# Altium PCB OBC ARM.PcbDoc
Units mil, origin at the board's own origin, x right, y up, seen from the top; angles counter-clockwise.
Board outline 3757.87 x 3555.12 mil, 4 copper layers (Top Layer, Ground, Power, Bottom Layer), stack 64.6 mil thick; 63 components, 74 nets, 326 pads, 150 vias.
Unrouted connection lines stored in the file: 62.
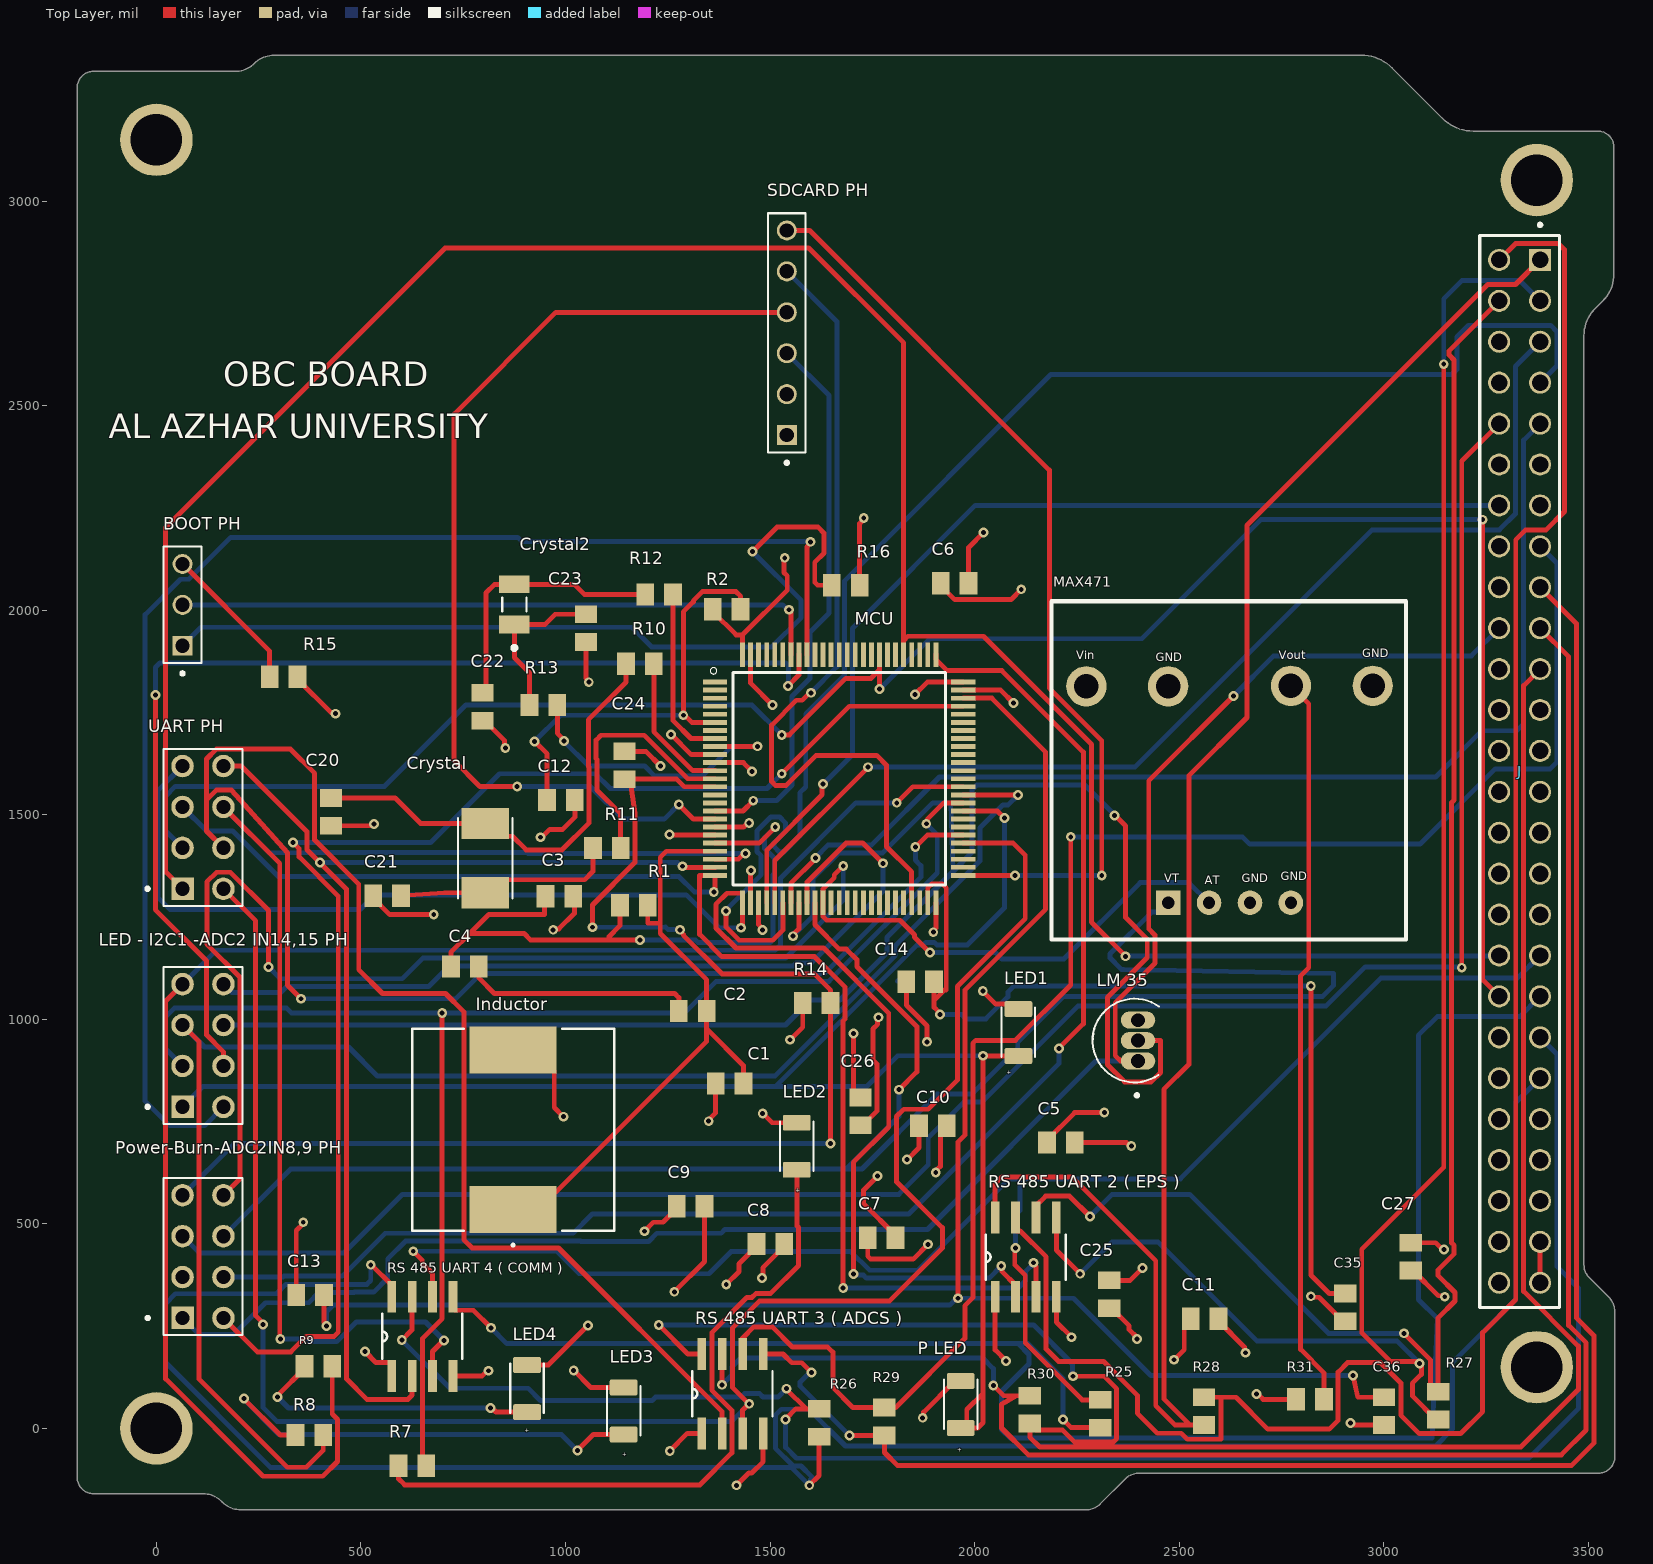
[diagram p0: Top Layer view]
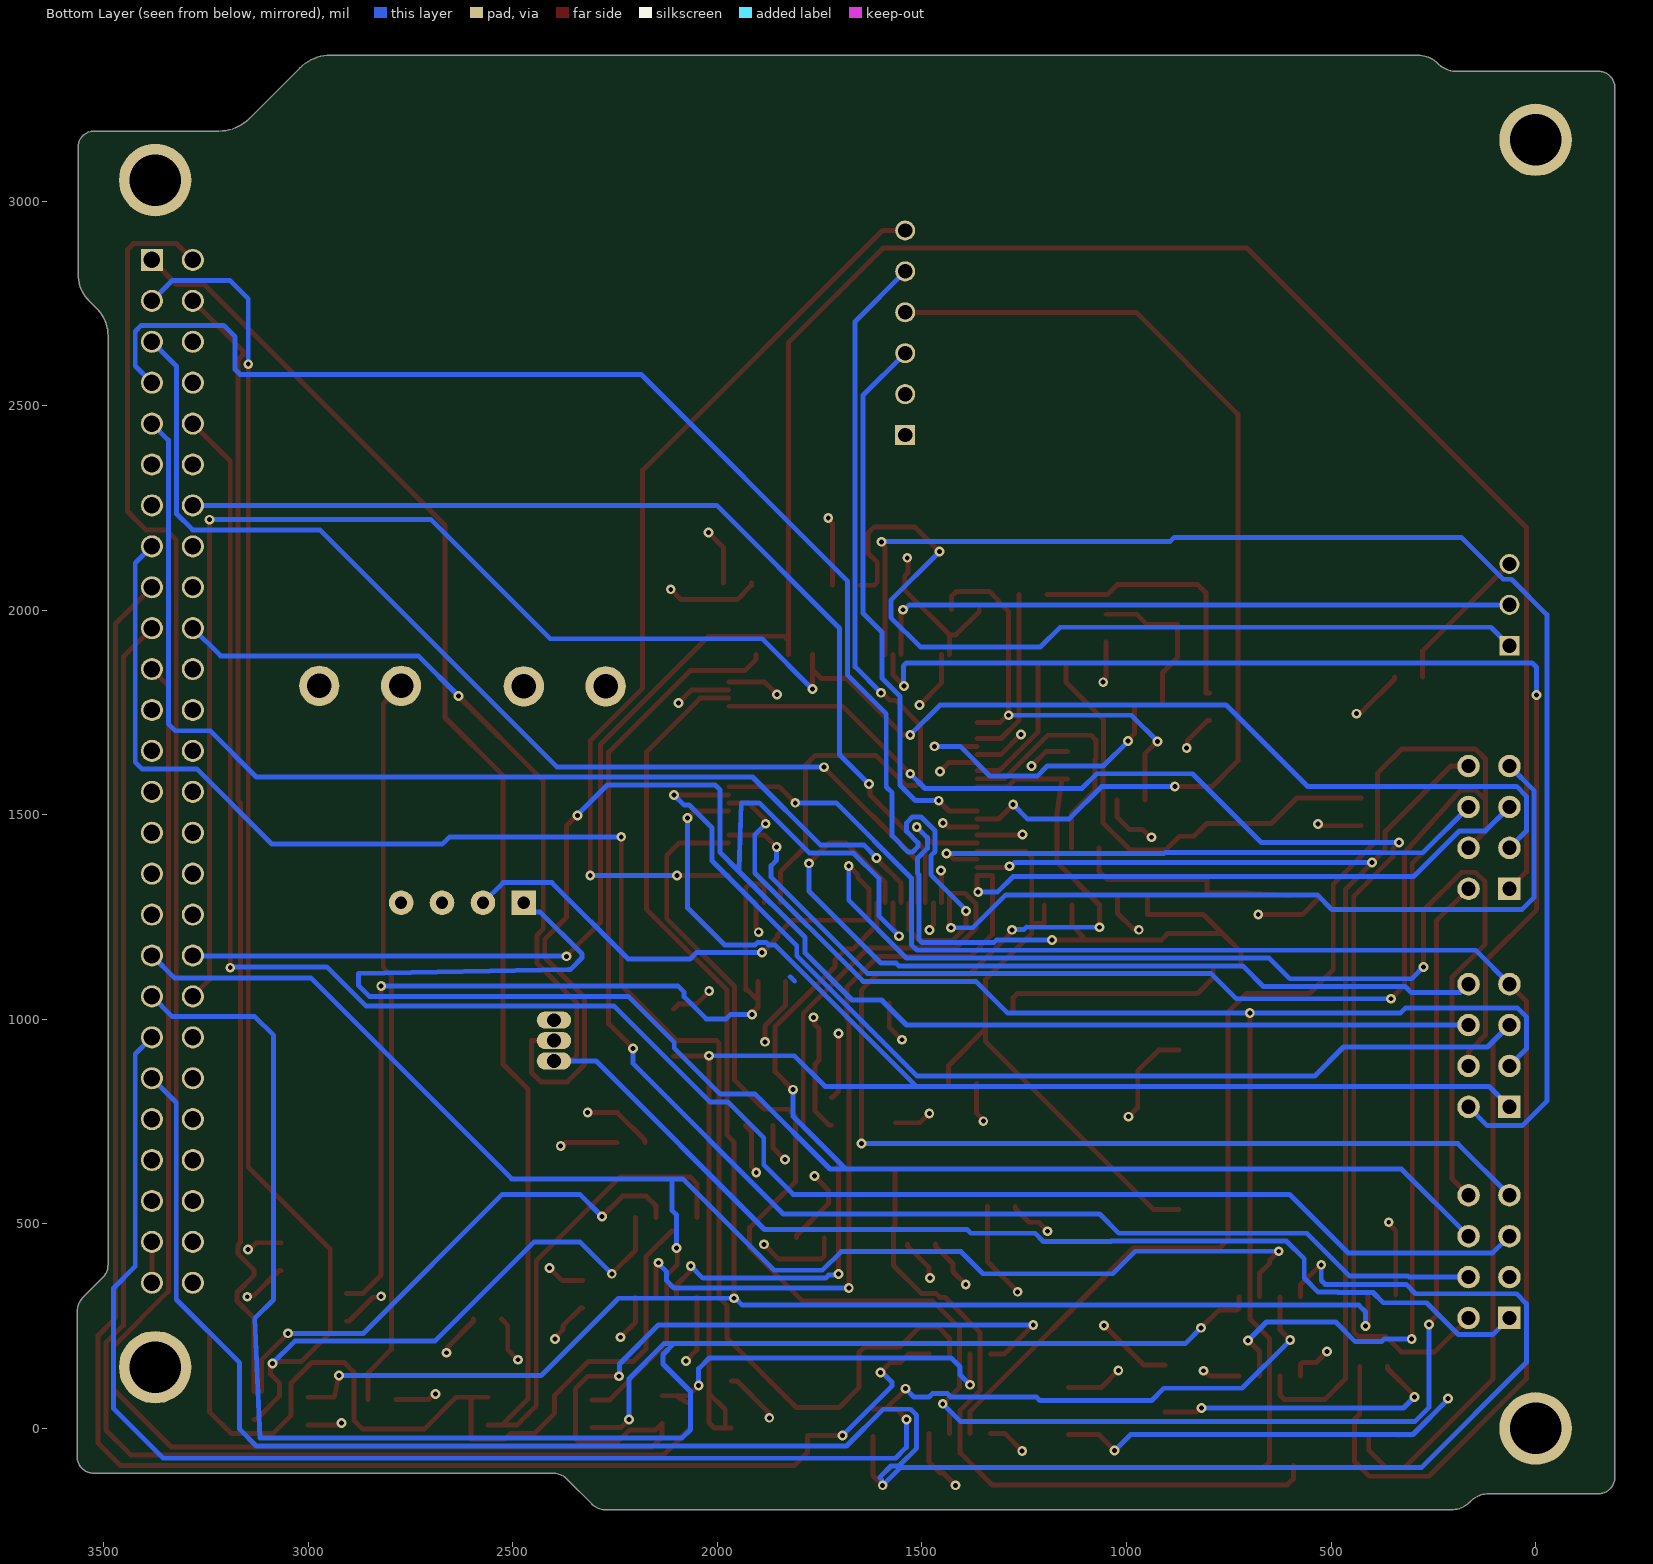
[diagram p1: Bottom Layer view, seen from below]
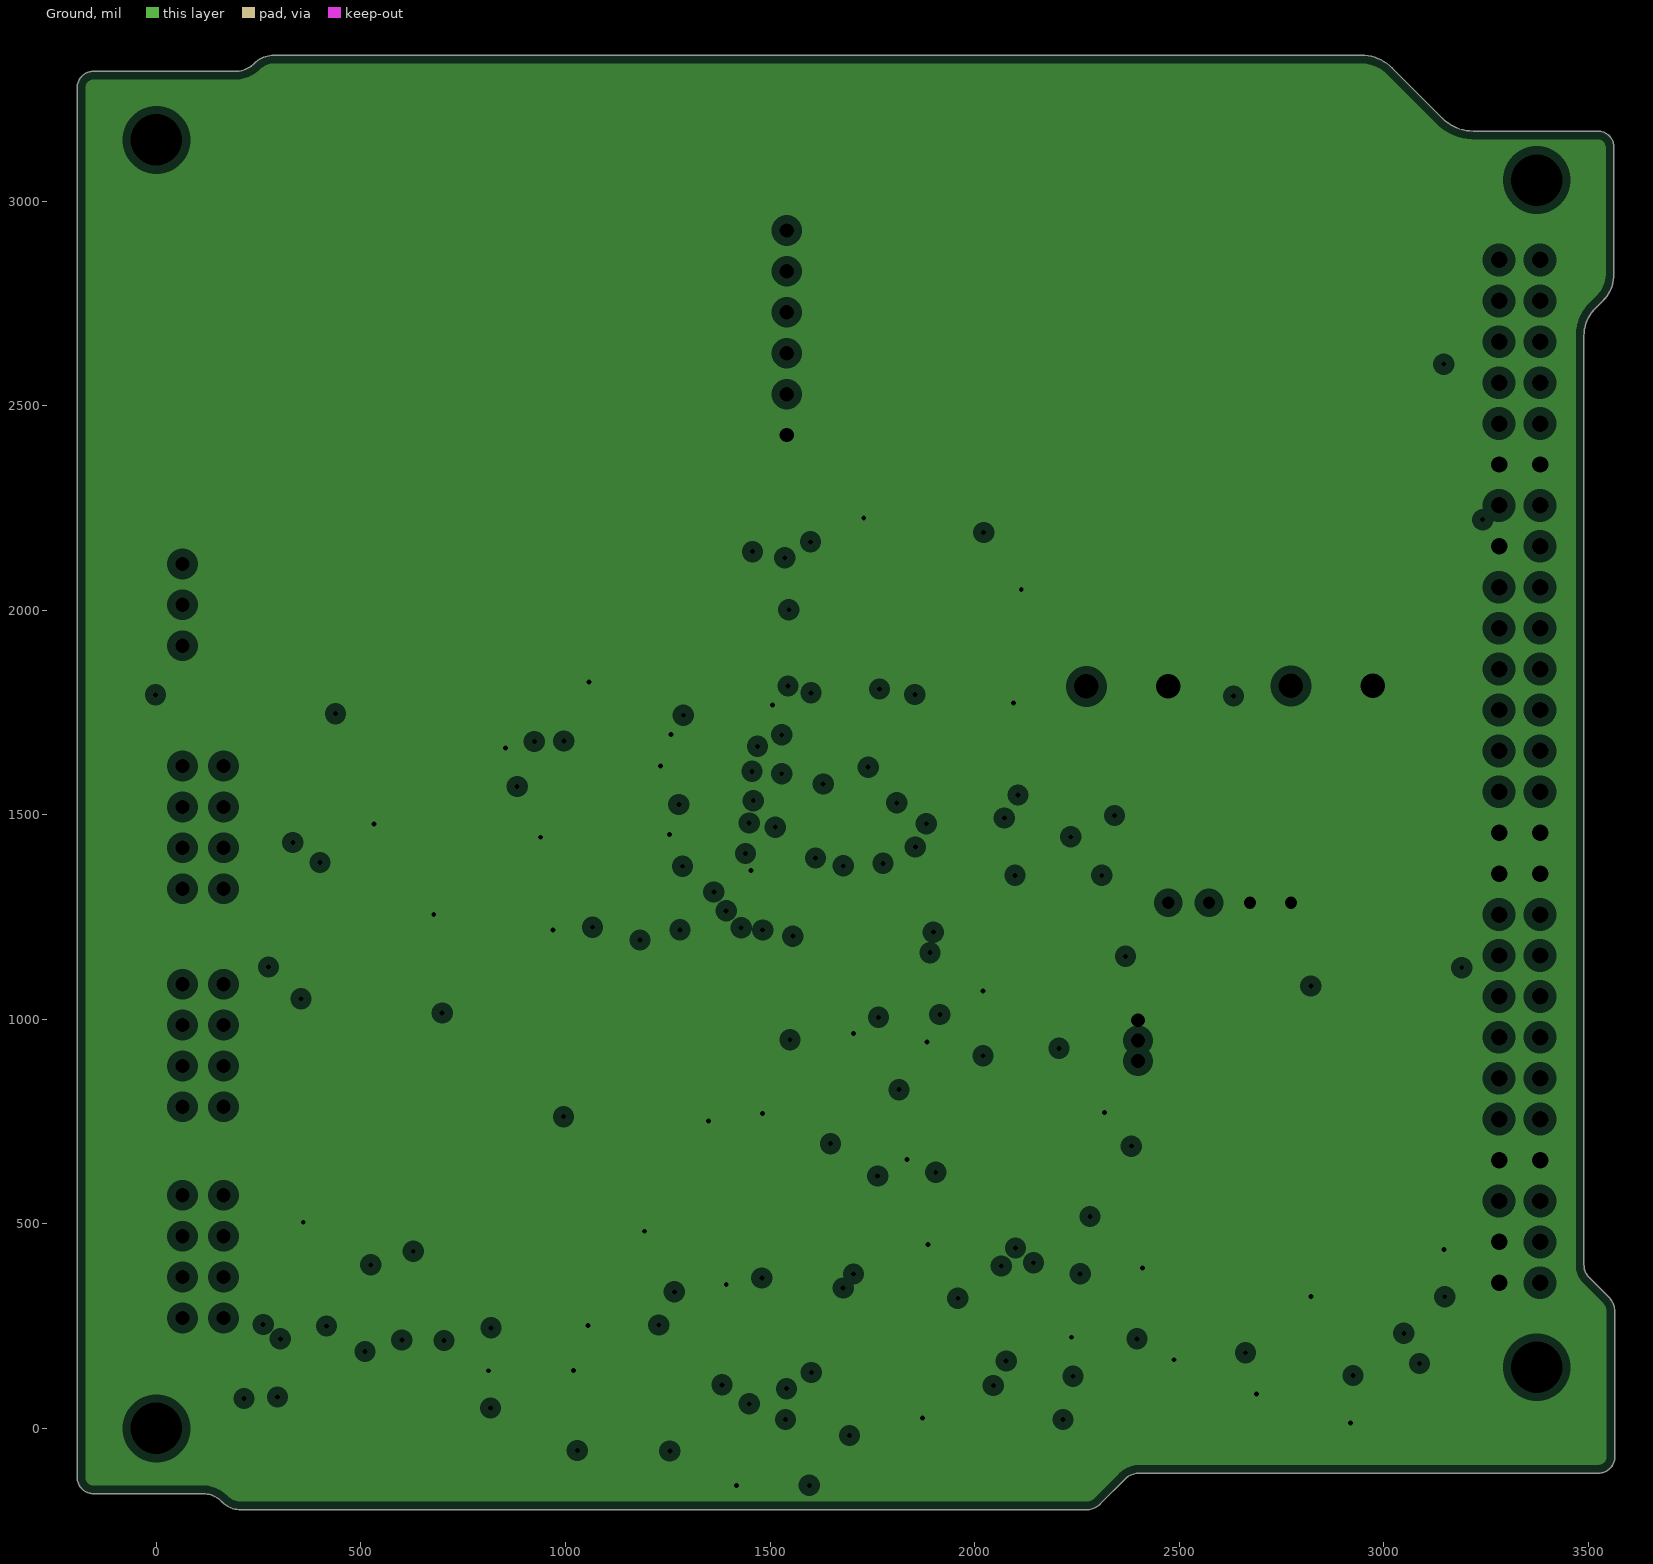
[diagram p2: Ground, clearances drawn from the general rule]
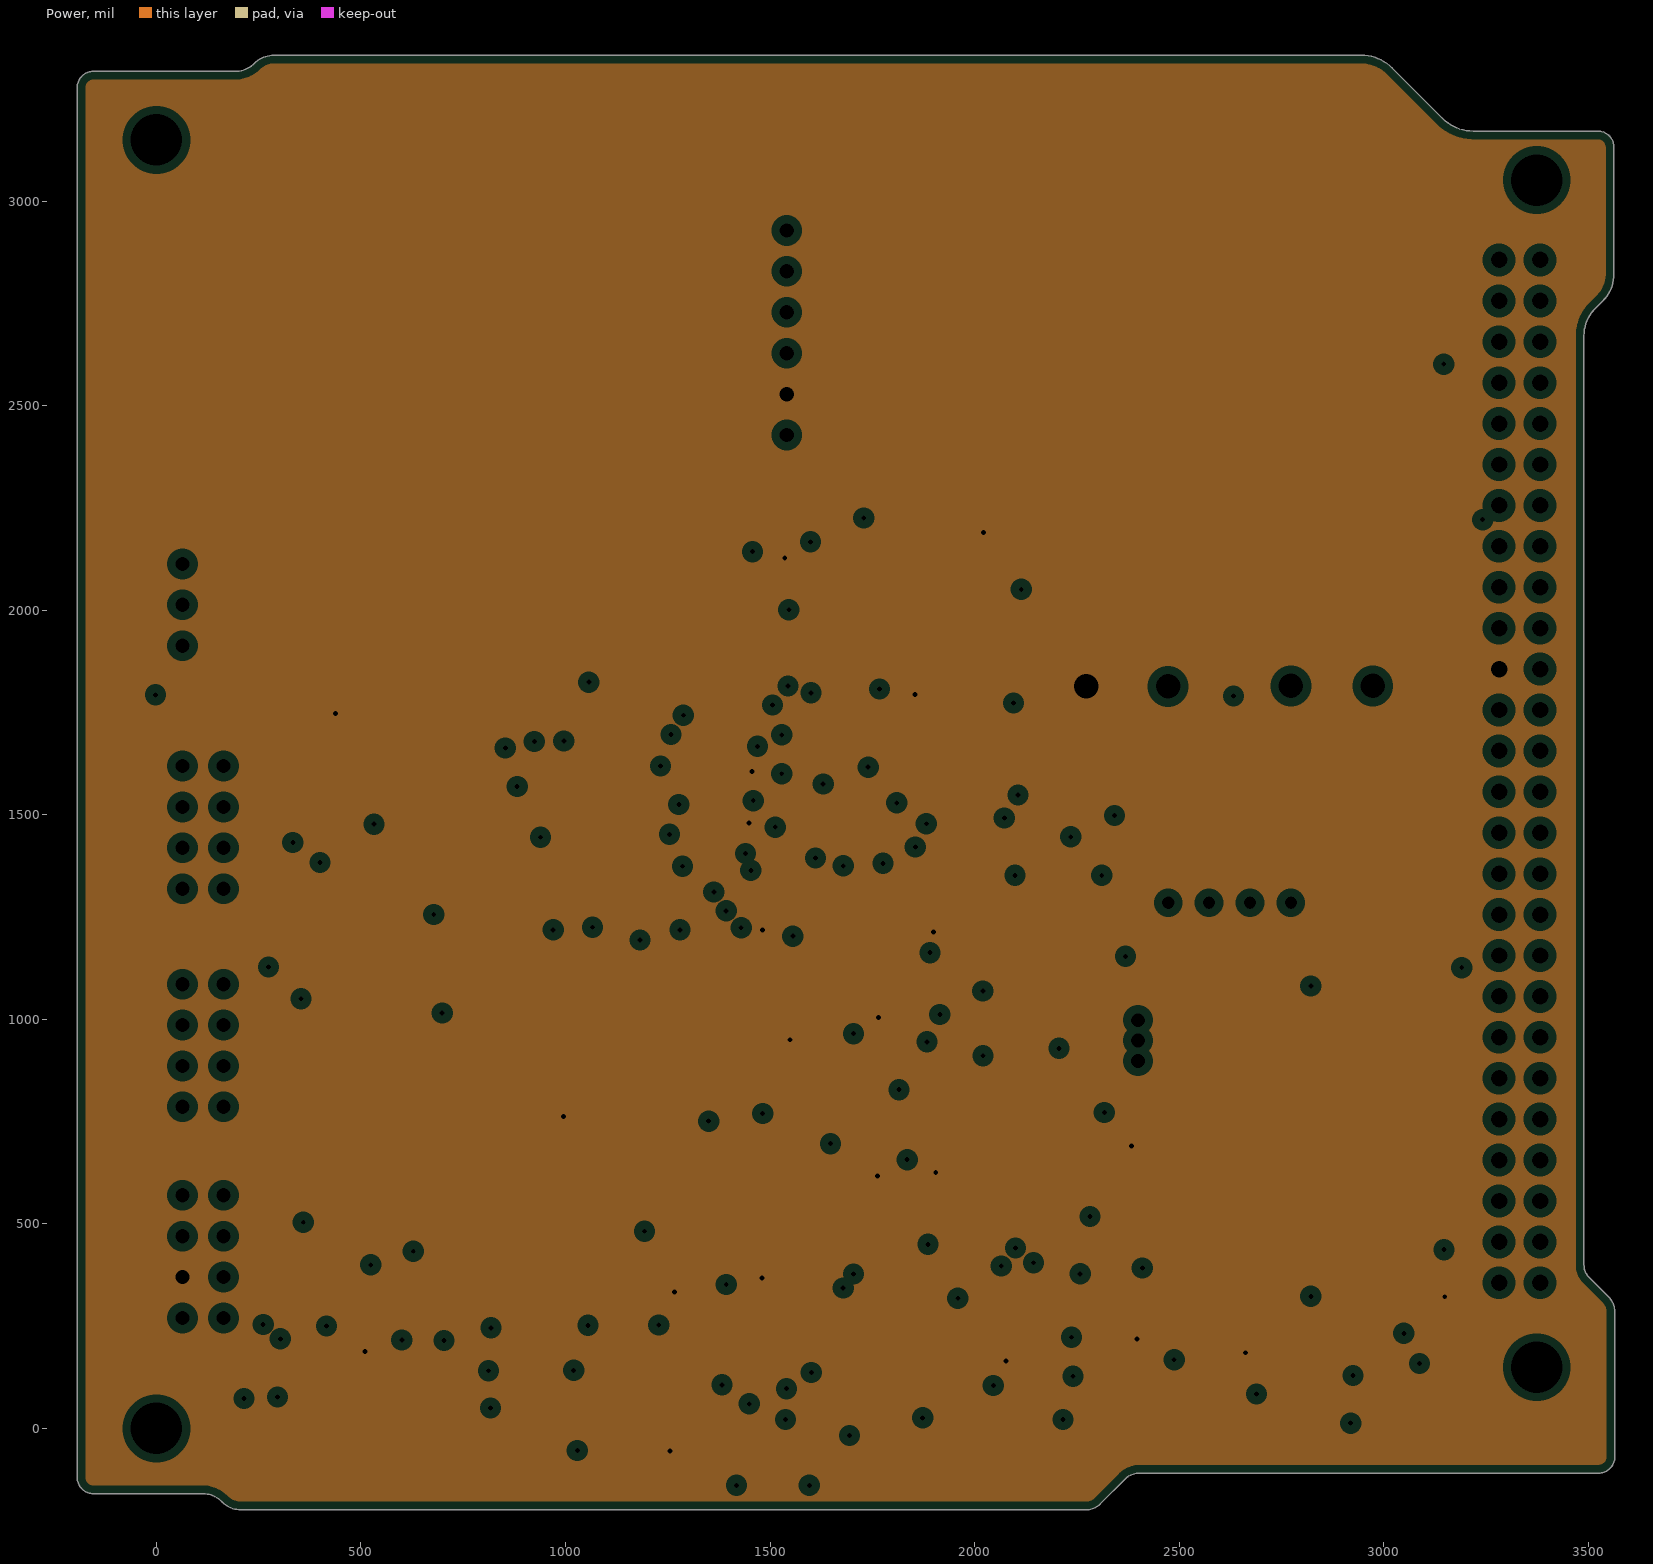
[diagram p3: Power, clearances drawn from the general rule]

## Layer stack, top to bottom
Top Solder: solder mask 0.4, Solder Resist, Dk 3.5
Top Layer: signal copper 1.4
Dielectric 1: prepreg 6.7, FR-4, Dk 4.35
Ground: plane copper 0.7, net G
Dielectric 3: core 47, FR-4, Dk 4.35
Power: plane copper 0.7, net 3.3v (OBC)
Dielectric 2: prepreg 6.7, FR-4, Dk 4.35
Bottom Layer: signal copper 1.4
Bottom Solder: solder mask 0.4, Solder Resist, Dk 3.5

## Board outline
114.17,-159.45 cw(c114.17,-223.13) 159.2,-178.1 161.27,-180.17 ccw(c206.3,-135.14) 206.3,-198.82 2272.83,-198.82 ccw(c2272.83,-150.82) 2306.78,-184.76 2368.42,-123.11 cw(c2402.36,-157.05) 2402.36,-109.06 3525.2,-109.06 ccw(c3525.2,-69.68) 3564.57,-69.68 3564.57,285.43 ccw(c3513.72,285.43) 3549.67,321.39 3528.54,342.52 3502.04,369.03 cw(c3532.62,399.61) 3489.37,399.61 3489.37,2671.26 cw(c3582.52,2671.26) 3516.65,2737.12 3535.32,2755.79 ccw(c3469.45,2821.65) 3562.6,2821.65 3562.6,3131.5 ccw(c3523.23,3131.5) 3523.23,3170.87 3218.5,3170.87 cw(c3218.5,3276.37) 3143.9,3201.77 3020.27,3325.4 ccw(c2945.67,3250.8) 2945.67,3356.3 287.48,3356.3 ccw(c287.48,3289.09) 239.96,3336.61 cw(c192.44,3384.14) 192.44,3316.93 -153.94,3316.93 ccw(c-153.94,3277.56) -193.31,3277.56 -193.31,-120.08 ccw(c-153.94,-120.08) -153.94,-159.45

## Design rules (kind name [scope] priority, off if disabled: settings)
Clearance [All] p1: gap=7 ignorepadtopadclearanceinfootprint=FALSE except(0: Arc-Hole Track-Hole SMDPad-Hole THPad-Hole Via-Hole Fill-Hole Poly-Hole Region-Hole Text-Hole)
ComponentClearance [All] p1: gap=30 collisioncheckmode=3 verticalgap=30 showdistances=FALSE
DiffPairsRouting [All] p1: maxlimit=10 minlimit=10 mostfreqgap=10 toplayer_minwidth=15 toplayer_maxwidth=15 toplayer_prefwidth=15 bottomlayer_minwidth=15 bottomlayer_maxwidth=15 bottomlayer_prefwidth=15 substack1={0761D619-B0FF-4D42-81BD-1B94FE1A46B2} toplayer_{0761d619-b0ff-4d42-81bd-1b94fe1a46b2}_minwidth=15 toplayer_{0761d619-b0ff-4d42-81bd-1b94fe1a46b2}_maxwidth=15 toplayer_{0761d619-b0ff-4d42-81bd-1b94fe1a46b2}_prefwidth=15 bottomlayer_{0761d619-b0ff-4d42-81bd-1b94fe1a46b2}_minwidth=15 bottomlayer_{0761d619-b0ff-4d42-81bd-1b94fe1a46b2}_maxwidth=15 bottomlayer_{0761d619-b0ff-4d42-81bd-1b94fe1a46b2}_prefwidth=15 maxuncoupledlength=500
HoleSize [All] p1: absolutevalues=TRUE maxlimit=130 minlimit=1 maxpercent=80.000 minpercent=20.000
HoleToHoleClearance [All] p1: gap=6 allowstackedmicrovias=TRUE
MinimumSolderMaskSliver [All] p1: minsoldermaskwidth=3
PlaneClearance [All] p1: clearance=20
PlaneConnect [All] p1: planeconnectstyle=Relief reliefexpansion=20 reliefentries=4 reliefconductorwidth=10 reliefairgap=10
PolygonConnect [All] p1: connectstyle=Relief reliefconductorwidth=10 reliefentries=4 polygonreliefangle="90 Angle" airgapwidth=10
RoutingVias [All] p1: holewidth=12 width=24 viastyle="Through Hole" minholewidth=10 minwidth=10 maxholewidth=12 maxwidth=24
SilkToSilkClearance [All] p1: silktosilkclearance=4
SilkToSolderMaskClearance [IsPad] p1: minsilkscreentomaskgap=4 clearancetoexposedcopper=TRUE
SolderMaskExpansion [All] p1: expansion=3 istentingtop=FALSE
Width [All] p1: maxlimit=40 minlimit=10 preferedwidth=12 substack1={0761D619-B0FF-4D42-81BD-1B94FE1A46B2} toplayer_{0761d619-b0ff-4d42-81bd-1b94fe1a46b2}_minwidth=7 bottomlayer_{0761d619-b0ff-4d42-81bd-1b94fe1a46b2}_minwidth=7 minimp=50.000000 maximp=50.000000 favimp=50.000000
21 further rules are at their usual default settings.

## Components (designator, comment, footprint, x,y, rotation, side; value= is the part's Value field where it differs from the comment)
"BOOT PH" "4-103327-5" TE_4-103327-5 64,1913 r90 top
C1 "1uF" CAPC2012X95N#1 1400.98,843 r0 top
C2 "100nF" CAPC2012X95N#1 1310.98,1020 r0 top
C3 "1uF" CAPC2012X95N#1 985,1301 r0 top
C4 "100nF" CAPC2012X95N#1 754,1129 r0 top
C5 "100nF" CAPC2012X95N#1 2211,699 r0 top
C6 "100nF" CAPC2012X95N#1 1951,2066 r0 top
C7 "100nF" CAPC2012X95N#1 1772.69,466.18 r0 top
C8 "100nF" CAPC2012X95N#1 1501,451 r0 top
C9 "100nF" CAPC2012X95N#1 1306,543 r0 top
C10 "100nF" CAPC2012X95N#1 1898,740 r0 top
C11 "100nF" CAPC2012X95N#1 2562,268 r0 top
C12 "1uF" CAPC2012X95N#1 989,1536 r0 top
C13 "1uF" CAPC2012X95N#1 376,326 r0 top
C14 "1uF" CAPC2012X95N#1 1867,1092 r0 top
C20 "20pF" CAPC2012X95N#1 427,1507.02 r90 top
C21 "20pf" CAPC2012X95N#1 564,1302 r0 top
C22 "6.8pF" CAPC2012X95N#1 797,1764 r90 top
C23 "6.8pf" CAPC2012X95N#1 1050,1956 r90 top
C24 "100nF" CAPC2012X95N#1 1144,1621 r90 top
C25 "100nf" CAPC2012X95N#1 2329,328 r90 top
C26 "100nf" CAPC2012X95N#1 1721,775 r90 top
C27 "100nf" CAPC2012X95N#1 3066,420 r90 top
C35 "1uF" CAPC2012X95N#1 2906,296 r90 top
C36 "1uF" CAPC2012X95N#1 3000.69,42.18 r90 top
Crystal "8MHZ" XTAL500X320X130N 804,1394 r90 top
Crystal2 "32.768kHz" XTAL_ECS-.327-12.5-34S-TR 875,2014 r90 top
Inductor "CDRH127/LDNP-470MC" IND_CDRH127/LDNP-470MC_SUM 872,730 r90 top
J "ESQ-126-39-G-D" SAMTEC_ESQ-126-39-G-D 3382,2856 r90 top locked
LED1 "BLUE-LED" RESC3015X65 2107,968 r90 top
LED2 "RED-LED" RESC3015X65 1565,690 r90 top
LED3 "GREEN-LED" RESC3015X65 1142,43 r90 top
LED4 "ORANGE-LED" RESC3015X65 906,98 r90 top
"LED - I2C1 -ADC2 IN14,15 PH" "5-146256-4" TE_5-146256-4 114,936 r90 top
"LM 35" "LM35DZ/NOPB" TO92127P521H735-3 2369,948 r90 top
MAX471 "MAX471?" PCBComponent_1 2473,1430 r0 top
MCU "STM32F427VGT7" QFP50P1600X1600X160-100N 1669,1588 r0 top
"P LED" "BLUE-LED" RESC3015X65 1966,59 r90 top
"Power-Burn-ADC2IN8,9 PH" "5-146256-4" TE_5-146256-4 114,420 r90 top
R1 "0" CAPC2012X95N#1 1167,1279 r0 top
R2 "0" CAPC2012X95N#1 1394.02,2002 r0 top
R7 "22" CAPC2012X95N#1 626,-91 r0 top
R8 "22" CAPC2012X95N#1 374,-16 r0 top
R9 "22" CAPC2012X95N#1 396,152 r0 top
R10 "0" CAPC2012X95N#1 1182,1869 r0 top
R11 "0" CAPC2012X95N#2 1101,1419 r0 top
R12 "0" CAPC2012X95N#1 1229,2038 r0 top
R13 "0" CAPC2012X95N#1 946.02,1768 r0 top
R14 "10K" CAPC2012X95N#1 1614,1040 r0 top
R15 "10k" CAPC2012X95N#1 311,1837 r0 top
R16 "10k" CAPC2012X95N#1 1685,2061 r0 top
R25 "120" CAPC2012X95N#1 2307,36 r90 top
R26 "120" CAPC2012X95N#1 1620,14 r90 top
R27 "100" CAPC2012X95N#1 3133,56 r90 top
R28 "100" CAPC2012X95N#1 2560.69,42.18 r90 top
R29 "100" CAPC2012X95N#1 1779,17 r90 top
R30 "100" CAPC2012X95N#1 2135,46 r90 top
R31 "330" CAPC2012X95N#1 2819.69,71.18 r0 top
"RS 485 UART 2 ( EPS )" "MAX488ESA+" SOIC127P600X175-8N 2125,419 r90 top
"RS 485 UART 3 ( ADCS )" "MAX488ESA+" SOIC127P600X175-8N 1408,85 r90 top
"RS 485 UART 4 ( COMM )" "MAX488ESA+" SOIC127P600X175-8N 650,225 r90 top
"SDCARD PH" "5-146285-6" TE_5-146285-6 1541,2428 r90 top
"UART PH" "5-146256-4" TE_5-146256-4 114,1469 r90 top

## Footprints (in the part's own frame and the unit in brackets; to place one, negate y for a bottom-side part, rotate by r counter-clockwise, add the part's x,y. Pads: shape width x height; smd on the part's side, far side on the other; paste and mask are expansions set on the pad)
CAPC2012X95N#1 [mm]
  rect 1.1x1.38 smd: 1(-0.863,0) 2(0.863,0)
CAPC2012X95N#2 [mm]
  rect 1.1x1.38 smd: 1(-0.863,0)
  rect 1.1x1.38 smd mask+0.076: 2(0.863,0)
IND_CDRH127/LDNP-470MC_SUM [mil]
  rect 114x213 smd: 1(-195,0) 2(195,0)
  silkscreen extent -285,-247 247,247
PCBComponent_1 [mil]
  rect 60x60 hole 30: 1(0,-145)
  round 60 hole 30: 2(100,-145) 3(200,-145) 4(300,-145)
  round 98.43 hole 60: 5(500,385) 6(300,385) 7(0,383.86) 8(-200,383.86)
  silkscreen extent -285,-235 581,592
QFP50P1600X1600X160-100N [mm]
  rect 1.5x0.3 smd mask+0.049: 1(-7.7,6) 2(-7.7,5.5) 3(-7.7,5) 4(-7.7,4.5) 5(-7.7,4) 6(-7.7,3.5) 7(-7.7,3) 8(-7.7,2.5) 9(-7.7,2) 10(-7.7,1.5) 11(-7.7,1) 12(-7.7,0.5) 13(-7.7,0) 14(-7.7,-0.5) 15(-7.7,-1) 16(-7.7,-1.5) 17(-7.7,-2) 18(-7.7,-2.5) 19(-7.7,-3) 20(-7.7,-3.5) 21(-7.7,-4) 22(-7.7,-4.5) 23(-7.7,-5) 24(-7.7,-5.5) 25(-7.7,-6) 51(7.7,-6) 52(7.7,-5.5) 53(7.7,-5) 54(7.7,-4.5) 55(7.7,-4) 56(7.7,-3.5) 57(7.7,-3) 58(7.7,-2.5) 59(7.7,-2) 60(7.7,-1.5) 61(7.7,-1) 62(7.7,-0.5) 63(7.7,0) 64(7.7,0.5) 65(7.7,1) 66(7.7,1.5) 67(7.7,2) 68(7.7,2.5) 69(7.7,3) 70(7.7,3.5) 71(7.7,4) 72(7.7,4.5) 73(7.7,5) 74(7.7,5.5) 75(7.7,6)
  rect 0.3x1.5 smd mask+0.049: 26(-6,-7.7) 27(-5.5,-7.7) 28(-5,-7.7) 29(-4.5,-7.7) 30(-4,-7.7) 31(-3.5,-7.7) 32(-3,-7.7) 33(-2.5,-7.7) 34(-2,-7.7) 35(-1.5,-7.7) 36(-1,-7.7) 37(-0.5,-7.7) 38(0,-7.7) 39(0.5,-7.7) 40(1,-7.7) 41(1.5,-7.7) 42(2,-7.7) 43(2.5,-7.7) 44(3,-7.7) 45(3.5,-7.7) 46(4,-7.7) 47(4.5,-7.7) 48(5,-7.7) 49(5.5,-7.7) 50(6,-7.7) 76(6,7.7) 77(5.5,7.7) 78(5,7.7) 79(4.5,7.7) 80(4,7.7) 81(3.5,7.7) 82(3,7.7) 83(2.5,7.7) 84(2,7.7) 85(1.5,7.7) 86(1,7.7) 87(0.5,7.7) 88(0,7.7) 89(-0.5,7.7) 90(-1,7.7) 91(-1.5,7.7) 92(-2,7.7) 93(-2.5,7.7) 94(-3,7.7) 95(-3.5,7.7) 96(-4,7.7) 97(-4.5,7.7) 98(-5,7.7) 99(-5.5,7.7) 100(-6,7.7)
  silkscreen extent -8,-6.6 6.6,6.9
RESC3015X65 [mm]
  rrect20% 0.98x1.72 smd: 1(-1.47,0) 2(1.45,0)
  silkscreen extent -1.53,-1.04 1.53,1.04
SAMTEC_ESQ-126-39-G-D [mm]
  rect 1.37x1.37 hole 1.02: 01(0,0)
  round 1.37 hole 1.02: 02(0,2.54) 03(-2.54,0) 04(-2.54,2.54) 05(-5.08,0) 06(-5.08,2.54) 07(-7.62,0) 08(-7.62,2.54) 09(-10.16,0) 10(-10.16,2.54) 11(-12.7,0) 12(-12.7,2.54) 13(-15.24,0) 14(-15.24,2.54) 15(-17.78,0) 16(-17.78,2.54) 17(-20.32,0) 18(-20.32,2.54) 19(-22.86,0) 20(-22.86,2.54) 21(-25.4,0) 22(-25.4,2.54) 23(-27.94,0) 24(-27.94,2.54) 25(-30.48,0) 26(-30.48,2.54) 27(-33.02,0) 28(-33.02,2.54) 29(-35.56,0) 30(-35.56,2.54) 31(-38.1,0) 32(-38.1,2.54) 33(-40.64,0) 34(-40.64,2.54) 35(-43.18,0) 36(-43.18,2.54) 37(-45.72,0) 38(-45.72,2.54) 39(-48.26,0) 40(-48.26,2.54) 41(-50.8,0) 42(-50.8,2.54) 43(-53.34,0) 44(-53.34,2.54) 45(-55.88,0) 46(-55.88,2.54) 47(-58.42,0) 48(-58.42,2.54) 49(-60.96,0) 50(-60.96,2.54) 51(-63.5,0) 52(-63.5,2.54)
  silkscreen extent -65.03,-1.21 2.27,3.74
SOIC127P600X175-8N [mil]
  rect 78x21 smd: 1(-97,75) 2(-97,25) 3(-97,-25) 4(-97,-75) 5(97,-75) 6(97,-25) 7(97,25) 8(97,75)
  silkscreen extent -55,-98 55,98
TE_4-103327-5 [mm]
  rect 1.24x1.24 hole 0.89: 1(0,0)
  round 1.24 hole 0.89: 2(2.54,0) 3(5.08,0)
  silkscreen extent -1.82,-1.17 6.15,1.17
TE_5-146256-4 [mil]
  rect 55.04x55.04 hole 35.04: 1(-150,50)
  round 55.04 hole 35.04: 2(-50,50) 3(50,50) 4(150,50) 5(-150,-50) 6(-50,-50) 7(50,-50) 8(150,-50)
  silkscreen extent -192,-96 192,139
TE_5-146285-6 [mm]
  rect 1.24x1.24 hole 0.89: 1(0,0)
  round 1.24 hole 0.89: 2(2.54,0) 3(5.08,0) 4(7.62,0) 5(10.16,0) 6(12.7,0)
  silkscreen extent -1.82,-1.17 13.77,1.17
TO92127P521H735-3 [mm]
  oval 1.07x2.14 hole 0.85 mask+0.051: 1(-1.27,-0.775) 2(0,-0.775) 3(1.27,-0.775)
  silkscreen extent -3.5,-2.08 2.6,2.04, body extent -2.4,-1.53 2.4,2.4, height 8
XTAL500X320X130N [mm]
  rect 1.95x2.95 smd mask+0.076: 1(-2.15,0) 2(2.15,0)
  silkscreen extent -2.5,-1.7 2.5,1.7
XTAL_ECS-.327-12.5-34S-TR [mm]
  rect 1.1x1.9 smd: 1(-1.25,0) 2(1.25,0)
  silkscreen extent -2.8,-0.75 0.44,0.75

## Part data
"BOOT PH": "Conn Unshrouded Header HDR 3 POS 2.54mm Solder ST Thru-Hole Carton", Package=None, Availability=Unavailable, EU_RoHS_Compliance=Compliant, MF="TE Connectivity", MP=4-103327-5, Price=None, SnapEDA_Link=https://www.snapeda.com/parts/4-103327-5/TE%20Connectivity%20AMP%20Connectors/view-part/2403997/?ref=snap, TE_purchase_URL=https://www.te.com/usa-en/product-4-103327-5.html?te_bu=Cor&te_type=disp&te_campaign=seda_glo_cor-seda-global-disp-prtnr-fy19-seda-model-bom-cta_sma-317_1&elqCampaignId=32493
C1 C2 C3 C4 C5 C6 C7 C8 C9 C10 C11 C12 C13 C14 C20 C21 C22 C23 C24 C25 C26 C27 C35 C36: library part UMK212SD103KD-T, "CAP CER 10000PF 50V 0805", Package=None, Availability=Unavailable, MP=UMK212SD103KD-T, Price=None
Crystal: library part ABM3-8.000MHZ-D2Y-T, "8MHz Â±20ppm Crystal 18pF 140 Ohms 2-SMD, No Lead", Package="SMD-2 Abracon", Digi-Key_Part_Number=535-10630-1-ND, Digi-Key_Purchase_URL=https://www.digikey.com/product-detail/en/abracon-llc/ABM3-8.000MHZ-D2Y-T/535-10630-1-ND/2344632?utm_source=snapeda&utm_medium=aggregator&utm_campaign=symbol, MF=Abracon, MP=ABM3-8.000MHZ-D2Y-T, SnapEDA_Link=https://www.snapeda.com/parts/ABM3-8.000MHZ-D2Y-T/Abracon%20LLC/view-part/106372/?ref=snap
Crystal2: library part ECS-.327-12.5-34S-TR, "32.768kHz Â±20ppm Crystal 12.5pF 70 kOhms 2-SMD, No Lead", Package="SMD-2 ECS International", Availability=Unavailable, MF="ECS Inc.", MP=ECS-.327-12.5-34S-TR, Price=None, SnapEDA_Link=https://www.snapeda.com/parts/ECS-.327-12.5-34S-TR/ECS%20Inc./view-part/2454548/?ref=snap
Inductor: "47ÂµH Shielded Inductor 3.25A 78mOhm Max Nonstandard", Package="Nonstandard Sumida", Check_prices=https://www.snapeda.com/parts/CDRH127/LDNP-470MC/Sumida%20America%20Components%20Inc./view-part/547921/?ref=eda, Digi-Key_Part_Number=308-1339-1-ND, MF="Sumida America", MP=CDRH127/LDNP-470MC, Purchase-URL=https://pricing.snapeda.com/search/part/CDRH127/LDNP-470MC/?ref=eda, SnapEDA_Link=https://www.snapeda.com/parts/CDRH127/LDNP-470MC/Sumida%20America%20Components%20Inc./view-part/547921/?ref=snap
J: "52 Position Elevated Socket Connector Through Hole", Package=None, Availability=Unavailable, MF=Samtec, MP=ESQ-126-39-G-D, Price=None, SnapEDA_Link=https://www.snapeda.com/parts/ESQ-126-39-G-D/Samtec%20Inc./view-part/490181/?ref=snap
LED1 LED2 LED3 LED4 "P LED": library part LTST-C150TBKT, "LED Blue 470nm LED Indication 3.3V"
"LED - I2C1 -ADC2 IN14,15 PH" "Power-Burn-ADC2IN8,9 PH" "UART PH": "08 MODII HDR DRST B/A .100CL LF", Package=None, Availability=Unavailable, MF="TE Connectivity", MP=5-146256-4, Price=None, SnapEDA_Link=https://www.snapeda.com/parts/5-146256-4/TE%20Connectivity%20AMP%20Connectors/view-part/500529/?ref=snap
"LM 35": "Temperature Sensor Analog, Local 0Â°C ~ 100Â°C 10mV/Â°C TO-92-3", Package="E-PKG AXIAL-LEADED-2 ON Semiconductor", Availability="Not in stock", Check_prices=https://www.snapeda.com/parts/LM35DZ/Texas+Instruments/view-part/?ref=eda, MF="Texas Instruments", MP=LM35DZ, Price=None, SnapEDA_Link=https://www.snapeda.com/parts/LM35DZ/Texas+Instruments/view-part/?ref=snap
MAX471: "MAX471 Voltage And Current Sensor Module Consume Voltage Load Detection Module"
MCU: "ARMÂ® CortexÂ®-M4 STM32F4 Microcontroller IC 32-Bit 180MHz 1MB _1M x 8_ FLASH 100-LQFP _14x14_", Package="LQFP-100 STMicroelectronics", Availability=Unavailable, MF=STMicroelectronics, MP=STM32F427VGT7, Price=None, SnapEDA_Link=https://www.snapeda.com/parts/STM32F427VGT7/STMicroelectronics/view-part/567621/?ref=snap
R1 R2 R7 R8 R9 R10 R11 R12 R13 R14 R15 R16 R25 R26 R27 R28 R29 R30 R31: library part RESISTOR
"RS 485 UART 2 ( EPS )" "RS 485 UART 3 ( ADCS )" "RS 485 UART 4 ( COMM )": "1/1 Transceiver Full RS422, RS485 8-SOIC", Package="SOIC-8 Maxim", Availability=Unavailable, MF="Maxim Integrated", MP=MAX488ESA+T, Price=None, SnapEDA_Link=https://www.snapeda.com/parts/MAX488ESA+T/Maxim%20Integrated/view-part/48834/?ref=snap
"SDCARD PH": "Connector Header Through Hole 6 position 0.100 (2.54mm)", Package=None, Digi-Key_Part_Number=A122872-ND, DigiKey-Purchase-URL=https://snapeda.com/shop?store=DigiKey&id=2411669, EU_RoHS_Compliance=Compliant, MF="TE Connectivity", MP=5-146285-6, SnapEDA_Link=https://www.snapeda.com/parts/5-146285-6/TE%20Connectivity%20AMP%20Connectors/view-part/2411669/?ref=snap

## Free pads (board coordinates)
  round 177.17 hole 125.98 unplated: 1(0,0) 2(0,3149.61) 3(3374.01,3051.18) 4(3374.01,149.61)

## Via types
v1: diameter 24, hole 12, Top Layer to Bottom Layer, 150 vias

## Nets (pads, with @x,y where several pads share a name; then routed paths per layer and width w, separated by ;. In a path a pad name is that pad's centre, name@x,y a point inside that pad or via, vN(x,y) a via of type N, cw(c..) or ccw(c..) an arc to the next point about the centre after c; other vN are vias at no path point)
3.3V: "Power-Burn-ADC2IN8,9 PH.3" J.10 | length 4840.3
  Top Layer w12: v1(3190.69,1126.18) 3190.69,2364.69 J.10
  Bottom Layer w12: 64,470 104.82,429.18 458.69,429.18 601.69,572.18 1814.69,572.18 1886.69,644.18 1886.69,710.18 1974.69,798.18 2018.34,798.18 2252.22,1032.06 2858.57,1032.06 2954.69,1128.18 3188.69,1128.18 v1(3190.69,1126.18)
"3.3V (ADCS)": J.28
"3.3V (COMM)": J.18
"3.3v (OBC)": "Power-Burn-ADC2IN8,9 PH.2" "RS 485 UART 2 ( EPS ).1" "RS 485 UART 3 ( ADCS ).1" "RS 485 UART 4 ( COMM ).1" "SDCARD PH.2" C5.2 C6.2 C7.2 C8.2 C9.2 C10.2 C11.2 C25.1 C26.1 C27.1 Inductor.2 J.22 MAX471.8 MCU.11 MCU.19 MCU.28 MCU.50 MCU.75 MCU.100 R2.1 R14.1 R15.2 | length 3268.9
  Top Layer w12: R15.2 344.98,1831.49 427.17,1749.3 435.7,1749.3 v1(438,1747) ; v1(510,188) 537,161 570.5,161 575,156.5 575,128 ; Inductor.2 921.5,925 972.5,874 972.5,784.5 v1(995,762) ; v1(1255,-55) 1298,-12 1333,-12 ; v1(1266,334) 1339.98,407.98 C9.2 ; R2.1 1360.05,1996.49 1416.96,1939.57 1432.78,1939.57 ; MCU.19 1435.64,1469.89 1445.75,1480 v1(1449,1480) ; MCU.11 1434.63,1627.37 v1(1456,1606) ; MCU.100 1432.78,1939.57 ; MCU.28 1472.15,1231.17 1481.89,1221.43 v1(1481.89,1218.18) ; v1(1480,368) 1482.3,370.3 1482.3,392.81 1534.98,445.49 C8.2 ; v1(1536,2128) 1533.77,2125.77 1533.77,2092 1542,2083.77 1542,2048.79 1432.78,1939.57 ; v1(1549,950) 1580.02,981.02 R14.1 ; C26.1 1726.51,741.02 1761.17,775.68 1761.17,890.63 1751.5,900.3 1751.5,976.51 1762.87,987.89 1762.87,1002.53 v1(1765.17,1004.83) ; v1(1763,617) 1728.69,582.69 1728.69,549.67 1806.67,471.69 C7.2 ; v1(1854,1794) 1884.22,1824.22 MCU.75 ; v1(1899,1213) 1899,1216.25 1905.22,1222.47 MCU.50 ; v1(1905.08,625.92) 1905.08,629.17 1916.32,640.41 1916.32,724.35 C10.2 ; C6.2 1984.98,2152.98 v1(2022,2190) ; 2050,322 2050,192 v1(2077,165) ; C5.2 2370.75,699 2379.75,690 v1(2383,690) ; C25.1 2334.51,294.02 2377.81,250.72 2377.81,241.44 2397,222.25 v1(2397,219) ; C11.2 2595.98,262.49 2659.7,198.76 2659.7,187.3 v1(2662,185) ; C27.1 3071.51,386.02 3133.24,324.3 3146.7,324.3 v1(3149,322)
5V: "LM 35.1" "Power-Burn-ADC2IN8,9 PH.1" J.20 | length 4448.5
  Top Layer w12: 2399.51,898 2356.69,898 2343.69,911 2343.69,1040.04 2440.87,1137.22 2440.87,1205.71 2425.69,1220.89 2425.69,1583.18 v1(2632.69,1790.18)
  Bottom Layer w12: 64,270 104.82,229.18 188.69,229.18 266.69,307.18 372.69,307.18 397.69,332.18 483.18,332.18 484.09,333.09 530.96,333.09 565.69,367.83 565.69,414.69 609.18,458.18 1036.5,458.18 1037.68,457 1203.36,457 1223.36,477 1380.51,477 1389.69,486.18 1884.69,486.18 2296.51,898 2399.51,898 ; v1(2632.69,1790.18) 2730.69,1888.18 3214.18,1888.18 J.20
"5V (EPS)": J.08
5V(CAMERA): J.06
BOOT0: "BOOT PH.2" MCU.94 | length 1598.8
  Top Layer w12: v1(1546,2001) 1546,1997.75 1550.89,1992.86 MCU.94
  Bottom Layer w12: 64,2013 1530.75,2013 1542.75,2001 v1(1546,2001)
"E-RST Hard Reset": J.42
"ENABLE OBC SENSORS": J.14 MCU.29 | length 2462.8
  Top Layer w12: MCU.29 1491.83,1413.62 1627.05,1548.83 1627.05,1572.54 v1(1629.69,1575.18)
  Bottom Layer w12: v1(1629.69,1575.18) 1701.39,1646.88 1701.39,1955.88 2001.51,2256 J.14
"Forwarding Pin": J.05 MCU.30 | length 2710
  Top Layer w12: MCU.30 1511.52,1388.01 v1(1739.69,1616.18)
  Bottom Layer w12: v1(1739.69,1616.18) 2391.69,1616.18 2971.69,2196.18 3282.69,2196.18 3321.97,2235.46 3321.97,2595.97 J.05
G: "LM 35.3" "P LED.2" "RS 485 UART 2 ( EPS ).4" "RS 485 UART 3 ( ADCS ).4" "RS 485 UART 4 ( COMM ).4" "SDCARD PH.1" C1.1 C3.2 C5.1 C6.1 C7.1 C8.1 C9.1 C10.1 C11.1 C12.2 C13.1 C14.1 C20.1 C21.1 C22.1 C23.1 C24.2 C25.2 C26.2 C27.2 C35.1 C36.1 J.11 J.12 J.16 J.29 J.30 J.31 J.32 J.45 J.46 J.50 J.52 LED1.2 LED2.2 LED3.2 LED4.2 MAX471.3 MAX471.4 MAX471.5 MAX471.7 MCU.10 MCU.20 MCU.27 MCU.74 MCU.99 R16.2 R31.1 | length 4783
  Top Layer w12: C13.1 342.02,483.78 359,500.75 v1(359,504) ; C20.1 524.8,1473.05 528.75,1477 v1(532,1477) ; C21.1 530.02,1296.49 570.51,1256 v1(678,1256) ; 725,128 795.75,128 808.75,141 v1(812,141) ; C22.1 802.51,1730.02 850.7,1681.83 850.7,1665.3 v1(853,1663) ; LED4.2 958.09,155.09 v1(1055,252) ; v1(939,1445) 942.25,1445 961.54,1464.3 993.3,1464.3 1022.98,1493.98 C12.2 ; v1(970,1218.68) 972.3,1220.98 983.98,1220.98 1022,1259 1022,1297.98 C3.2 ; v1(1020,142) 1061.91,100.09 LED3.2 ; C23.1 1050,1834.25 1057,1827.25 v1(1057,1824) ; C24.2 1196.36,1654.98 v1(1232.16,1619.18) ; v1(1193,482) 1214.88,503.88 1238.41,503.88 1272.02,537.49 C9.1 ; v1(1254,1452) 1255.7,1450.3 1365.76,1450.3 MCU.20 ; v1(1258.18,1696.18) 1307.3,1647.06 MCU.10 ; v1(1350,751) 1350,754.25 1367,771.25 C1.1 ; v1(1393,352) 1424.14,383.14 1424.14,402.61 1467.02,445.49 C8.1 ; v1(1418,-139) 1448.15,-108.85 1455.15,-108.85 1483,-81 1483,-12 ; MCU.27 1452.56,1284.95 1452.56,1363.41 v1(1453.15,1364) ; MCU.99 1452.46,1821.54 v1(1506,1768) ; v1(1482,770) 1504.91,747.09 LED2.2 ; v1(1703.69,965.02) 1703.69,824.63 1719.35,808.98 C26.2 ; R16.2 1718.98,2211.73 1729,2221.75 v1(1729,2225) ; C7.1 1738.72,421.02 1745.87,413.86 1849.86,413.86 v1(1886,450) ; C14.1 1833.02,1034.97 1883.69,984.3 v1(1883.69,945) ; v1(1835,657) 1864.02,686.02 C10.1 ; v1(1873,26) 1875.3,28.3 1875.3,39.95 1951.43,116.09 1966,116.09 ; C6.1 1917.02,2060.49 1951.68,2025.83 2088.83,2025.83 v1(2114,2051) ; MCU.74 2063.46,1804.54 v1(2095,1773) ; v1(2020,1069) 2051.9,1037.1 2094.98,1037.1 LED1.2 ; C5.1 2177.02,704.51 2244.51,772 v1(2317,772) ; 2200,322 2200,260 v1(2237,223) ; C25.2 2379.98,361.98 v1(2410,392) ; v1(2487.69,168) 2512.37,192.68 2512.37,252.35 C11.1 ; v1(2689,84) 2692.25,84 2705.07,71.18 R31.1 ; v1(2821.69,323) 2823.99,320.7 2841.81,320.7 2900.49,262.02 C35.1 ; v1(2919,13) 2922.25,13 2927.04,8.21 C36.1 ; C27.2 3126.78,453.98 3143.75,437 v1(3147,437)
"NetBOOT PH_1": "BOOT PH.1" R16.1 | length 2170.9
  Top Layer w12: v1(1457,2143) 1517,2203 1617.36,2203 1632,2188.36 1632,2139.56 1609.26,2116.82 1609.26,2068.03 1616.29,2061 R16.1
  Bottom Layer w12: 64,1913 109.18,1958.18 1162.21,1958.18 1210.21,1910.18 1504.24,1910.18 1575.89,1981.83 1575.89,2024.11 v1(1457,2143)
"NetBOOT PH_3": "BOOT PH.3" R15.1 | length 364.2
  Top Layer w12: 64,2113 277.02,1899.98 R15.1
NetC2_1: C2.1 C4.2 | length 569.7
  Top Layer w12: C4.2 787.98,1101.18 825.98,1063.18 1266.69,1063.18 1277,1052.87 C2.1
NetC20_2: C20.2 Crystal.2 R10.1 | length 1138.5
  Top Layer w12: C20.2 583.69,1541 646.05,1478.65 Crystal.2 835.28,1447.37 870.63,1447.37 904,1414 991.48,1414 1057.69,1480.21 1057.69,1616.45 1055.83,1618.31 1055.83,1731.75 1148.02,1823.94 R10.1
NetC21_2: C21.2 Crystal.1 R11.1 | length 567.5
  Top Layer w12: C21.2 704.05,1309.36 Crystal.1@803.69,1309.36 ; Crystal.1 Crystal.1@803.69,1309.36 ; R11.1 1067.02,1361.18 1047.02,1341.18 803.69,1341.18 Crystal.1@803.69,1309.36
NetC22_2: C22.2 Crystal2.2 R12.1 | length 661.4
  Top Layer w12: C22.2 805.69,1797.98 805.69,2042.21 826.69,2063.21 Crystal2.2 1021.69,2063.21 1046.91,2038 R12.1
NetC23_2: C23.2 Crystal2.1 R13.1 | length 397.6
  Top Layer w12: R13.1 912.04,1847.18 875,1884.23 Crystal2.1 949.69,1964.79 974.88,1989.98 C23.2
NetLED2_1: LED2.1 R7.1 | length 1715.7
  Top Layer w12: R7.1 592.02,-123.15 606.69,-137.82 1328.69,-137.82 1406.69,-59.82 1406.69,44.36 1357.69,93.36 1357.69,234.18 1443.51,320 1455.64,320 1465.82,330.18 1501.69,330.18 1569.69,398.18 1569.69,491.18 1565.69,495.18 1565.69,632.13 LED2.1
NetLED3_1: LED3.1 R8.1 | length 1160.9
  Top Layer w12: v1(214,73) 303,-16 R8.1 ; v1(1029,-54) 1068.13,-14.87 LED3.1
  Bottom Layer w12: v1(214,73) 214,71 299.82,-14.82 989.82,-14.82 v1(1029,-54)
NetLED4_1: LED4.1 R9.1 | length 727.6
  Top Layer w12: v1(296,77) 298.3,79.3 298.3,82.76 362.02,146.49 R9.1 ; v1(817,50) 820.25,50 830.12,40.13 LED4.1
  Bottom Layer w12: v1(296,77) 323,50 v1(817,50)
NetMAX471_6: MAX471.6 R31.2 | length 1793.8
  Top Layer w12: MAX471.6 2816.69,1771.31 2816.69,1126.18 2796.69,1106.18 2796.69,193.18 2853.67,136.21 R31.2
NRST: "Power-Burn-ADC2IN8,9 PH.4" C24.1 MCU.14 R14.2 | length 3295.7
  Top Layer w12: v1(1066,1225) 1066,1279.49 1169.69,1383.18 1169.69,1503.18 C24.1@1157.69,1587.02 ; C24.1 C24.1@1157.69,1587.02 ; v1(1280.04,1218.68) 1280.04,1215.43 1288,1207.47 1288,1205.87 1382.69,1111.18 1607.69,1111.18 1647.98,1070.9 R14.2 v1(1647.98,696.18) ; MCU.14 1290.4,1568.32 1271.69,1587.02 C24.1@1157.69,1587.02
  Bottom Layer w12: 64,570 190.18,696.18 v1(1647.98,696.18) ; v1(1066,1225) 1243.26,1225 1244.04,1225.77 1250.04,1219.77 1278.95,1219.77 v1(1280.04,1218.68)
OSC32_IN: MCU.8 R12.2 | length 428.8
  Top Layer w12: R12.2 1262.98,1730.14 1306.69,1686.43 MCU.8
OSC32_OUT: MCU.9 R13.2 | length 737.2
  Top Layer w12: R13.2 980,1699.25 996,1683.25 v1(996,1680) ; MCU.9 1468.81,1666.74 v1(1469.25,1667.18)
  Bottom Layer w12: v1(996,1680) 1056.82,1619.18 1193.38,1619.18 1218.38,1594.18 1333.69,1594.18 1406.69,1667.18 v1(1469.25,1667.18)
OSC_IN: MCU.12 R10.2 | length 355.3
  Top Layer w12: R10.2 1215.98,1703.02 1311.31,1607.69 MCU.12
OSC_OUT: MCU.13 R11.2 | length 628.1
  Top Layer w12: R11.2 1134.98,1502.18 1076.69,1560.47 1076.69,1635.32 1074.83,1637.18 1074.83,1682.32 1086.69,1694.18 1192.51,1694.18 1298.69,1588 MCU.13
PA0: "RS 485 UART 4 ( COMM ).3" "UART PH.7" MCU.23 | length 3302.4
  Top Layer w12: 164,1519 301.69,1381.31 301.69,220.31 v1(303,219) ; 675,128 675,188.18 701.82,215 v1(703,215) ; MCU.23 1422.46,1391.15 1436.83,1405.52 v1(1440.08,1405.52)
  Bottom Layer w12: 164,1519 275.89,1407.11 378.69,1407.11 379.76,1408.18 905.43,1408.18 908.09,1405.52 v1(1440.08,1405.52) ; v1(303,219) 370.06,219 376.88,212.18 440.69,212.18 488.69,260.18 657.82,260.18 v1(703,215)
PA1: "RS 485 UART 4 ( COMM ).2" "UART PH.8" MCU.24 | length 2850.9
  Top Layer w12: 164,1619 207.89,1619 367.83,1459.06 367.83,1415.17 v1(399.82,1383.18) 464.69,1318.31 464.69,121.18 514.69,71.18 615,71.18 625,81.18 625,128 ; v1(1286,1374) 1289.25,1374 1291.78,1371.47 MCU.24
  Bottom Layer w12: v1(399.82,1383.18) 1273.57,1383.18 1282.75,1374 v1(1286,1374)
PA2: "RS 485 UART 2 ( EPS ).3" "UART PH.3" MCU.25 | length 3344.5
  Top Layer w12: v1(1362.58,1311.42) 1362.58,1314.67 1365.85,1317.94 MCU.25 1327.96,1351.78 1327.96,1207.54 1382.32,1153.18 1608.69,1153.18 1682.69,1079.18 1682.69,1000.18 1678.69,996.18 v1(1678.69,343.18) ; v1(2144,405) 2144,401.75 2150,395.75 2150,322
  Bottom Layer w12: 64,1519 122.82,1460.18 186.69,1460.18 297.87,1349 1277.23,1349 1314.81,1311.42 v1(1362.58,1311.42) ; v1(1678.69,343.18) 2106.27,343.18 2123.99,360.9 2123.99,382.59 2144,402.6 v1(2144,405)
PA3: "RS 485 UART 2 ( EPS ).2" "UART PH.4" MCU.26 | length 3701.5
  Top Layer w12: v1(1429.31,1223.79) 1429.31,1227.04 1432.78,1230.51 1432.78,1308.18 1394.69,1308.18 1367.69,1281.18 1367.69,1223.18 1416.69,1174.18 1631.17,1174.18 1790.17,1015.18 1790.17,736.66 1703.69,650.18 v1(1703.69,377.36) ; v1(2065,397) 2067.3,394.7 2067.3,383.2 2100,350.5 2100,322
  Bottom Layer w12: 64,1619 3.69,1558.69 3.69,1298.18 33.69,1268.18 497.69,1268.18 533.69,1304.18 1295.18,1304.18 1375.57,1223.79 v1(1429.31,1223.79) ; v1(1703.69,377.36) 1705.99,375.07 1727.94,375.07 1735.44,367.57 2035.57,367.57 v1(2065,397)
PA6: J.07 MCU.31 | length 3611.7
  Top Layer w12: v1(1392.69,1265) 1392.69,1225.05 1424.56,1193.18 1506.37,1193.18 1531.2,1218.02 MCU.31
  Bottom Layer w12: v1(1392.69,1265) 1392.69,1268.05 1478.15,1353.51 1478.15,1399.73 1467.84,1410.03 1467.84,1460.33 1502.24,1494.73 1522.95,1494.73 1537.6,1480.09 1537.6,1459.38 1509.89,1431.67 1509.89,1421.73 1523.16,1408.46 1533.1,1408.46 1573,1448.36 1573,1553.49 1587.17,1567.66 1587.17,1746.66 1682.39,1841.88 1682.39,2071.88 2186.69,2576.18 3166.69,2576.18 3178.69,2588.18 3178.69,2668.18 3206.69,2696.18 3407.69,2696.18 3422.69,2681.18 3422.69,2596.69 J.07
PA7: J.09 MCU.32 | length 2751.9
  Top Layer w12: MCU.32 1550.89,1332.38 1611,1392.49 v1(1611,1394)
  Bottom Layer w12: v1(1611,1394) 1611,1395.13 1642.05,1426.18 1748.13,1426.18 1914.13,1592.18 3126.69,1592.18 3239.69,1705.18 3324.69,1705.18 3341.69,1722.18 3341.69,2415.69 J.09
PA13: "Power-Burn-ADC2IN8,9 PH.5" MCU.72 | length 3384.2
  Top Layer w12: 164,270 246.82,187.18 328.69,187.18 366.69,225.18 434.69,225.18 444.69,235.18 444.69,1301.18 348.83,1397.04 348.83,1417.04 v1(333.69,1432.18) ; v1(1528.69,1600.18) 1693.68,1765.17 MCU.72
  Bottom Layer w12: v1(333.69,1432.18) 670.69,1432.18 838.69,1600.18 1073.13,1600.18 1109.31,1564 1492.51,1564 v1(1528.69,1600.18)
PA14: "Power-Burn-ADC2IN8,9 PH.6" MCU.76 | length 3509.9
  Top Layer w12: MCU.76 1905.22,1879.99 1932.89,1852.32 2066.46,1852.32 2265.69,1653.08 2265.69,988.69 v1(2206,929)
  Bottom Layer w12: 164,370 309.35,370 311.53,372.18 454.33,372.18 559.33,477.18 1018.69,477.18 1065.69,524.18 1838.69,524.18 2206,891.49 v1(2206,929)
PB0: "Power-Burn-ADC2IN8,9 PH.7" MAX471.1 MCU.35 | length 4600.9
  Top Layer w12: MCU.35 1609.94,1231.18 1669.55,1171.57 1686.69,1171.57 1712.14,1146.12 1712.14,1128.98 1858.69,982.43 1858.69,871.53 v1(1815.17,828)
  Bottom Layer w12: 164,470 328.18,634.18 1686.69,634.18 ; v1(1815.17,828) 1815.17,762.66 1686.69,634.18 ; MAX471.1 2450.77,1262.77 2433.77,1262.77 2330.97,1159.97 2330.97,1150.03 2356.01,1124.99 2359.43,1121.57 2364.28,1121.48 2876.69,1112.18 2876.69,1082.18 2850.69,1056.18 2217.75,1056.18 2105.34,943.77 2105.34,929.59 1992.92,817.18 1907.69,817.18 1724.69,634.18 1686.69,634.18
PB1: "Power-Burn-ADC2IN8,9 PH.8" MAX471.2 MCU.36 | length 3965.6
  Top Layer w12: 164,570 204.52,610.52 204.52,1102.78 123.48,1183.82 123.48,1335.78 147.22,1359.52 180.78,1359.52 274,1266.3 v1(274,1128) ; v1(1679,1375) 1656.87,1352.87 1656.87,1346.22 1629.73,1319.08 1629.73,1284.95 MCU.36 1629.73,1284.76 1629.73,1250.62 1638.17,1242.18 1817.51,1242.18 1853.11,1206.59 1853.11,1200.89 v1(1891,1163)
  Bottom Layer w12: v1(274,1128) 302.82,1099.18 600.69,1099.18 651.19,1149.68 1537.65,1149.68 1679,1291.03 v1(1679,1375) ; v1(1891,1163) 2051.25,1163 2066.73,1147.53 2218.04,1147.53 2404.69,1334.18 2523.82,1334.18 MAX471.2
PB6: "LED - I2C1 -ADC2 IN14,15 PH.5" MCU.92 | length 3412.7
  Top Layer w12: MCU.92 1590.26,2155.01 1599,2163.75 v1(1599,2167)
  Bottom Layer w12: 164,786 118.18,740.18 32.69,740.18 -27.31,800.18 -27.31,1989.18 59.1,2075.59 79.5,2075.59 181.91,2178 883.33,2178 893.33,2168 1598,2168 v1(1599,2167)
PB7: "LED - I2C1 -ADC2 IN14,15 PH.6" MCU.93 | length 2734.5
  Top Layer w12: v1(-2.31,1793) -2.31,1267.78 122.69,1142.78 122.69,961.97 164,920.66 164,886 ; v1(1544.08,1814.92) 1570.57,1841.42 MCU.93
  Bottom Layer w12: v1(-2.31,1793) -2.31,1859.84 9.03,1871.18 1537.97,1871.18 1545,1864.15 1545,1815.84 v1(1544.08,1814.92)
PB10: "SDCARD PH.5" MCU.47 | length 2061.4
  Top Layer w12: v1(1600,1798) 1596.75,1798 1578.59,1779.83 1564.35,1779.83 1503.69,1719.18 1503.69,1581.18 1513.69,1571.18 1538.69,1571.18 1612.69,1645.18 1760.69,1645.18 1784.69,1621.18 1784.69,1422.18 1846.16,1360.71 MCU.47
  Bottom Layer w12: 1541,2828 1663.39,2705.61 1663.39,1861.39 v1(1600,1798)
PB12: "SDCARD PH.6" MCU.51 | length 2266.3
  Top Layer w12: 1541,2928 1596.87,2928 2182.69,2342.18 2182.69,1809.18 2310.69,1681.18 v1(2310.69,1351.78) ; MCU.51 v1(2098.69,1351.78)
  Bottom Layer w12: v1(2098.69,1351.78) v1(2310.69,1351.78)
PC2: "SDCARD PH.3" MCU.17 | length 1350.1
  Top Layer w12: MCU.17 1433.77,1509.26 v1(1458.86,1534.35)
  Bottom Layer w12: v1(1458.86,1534.35) 1515.86,1534.35 1553.69,1572.18 1553.69,1789.18 1597.69,1833.18 1597.69,1946.36 1644.39,1993.06 1644.39,2524.61 1541,2628
PC3: "SDCARD PH.4" MCU.18 | length 2490.3
  Top Layer w12: v1(882,1569) 790.87,1569 727.69,1632.18 727.69,2479.18 976.51,2728 1541,2728 ; v1(1277,1525) 1312.42,1489.58 MCU.18
  Bottom Layer w12: v1(882,1569) 1060.94,1569 1140.76,1489.18 1241.18,1489.18 v1(1277,1525)
PC4: "LED - I2C1 -ADC2 IN14,15 PH.7" "LM 35.2" MCU.33 | length 4368.3
  Top Layer w12: v1(1555.81,1203.19) 1555.81,1206.44 1570.57,1221.21 MCU.33 ; v1(2342,1498) 2343.87,1498 2368.69,1473.18 2368.69,1249.18 2421.87,1196 2421.87,1151.18 2324.69,1054 2324.69,889.18 2366.69,847.18 2431.69,847.18 2454.64,870.13 2454.64,948 2399.51,948
  Bottom Layer w12: 164,986 1537.69,986 1598.87,1047.18 1670.82,1047.18 1785.59,1161.95 1785.59,1199.82 1948.3,1362.53 ; v1(1555.81,1203.19) 1604.69,1252.08 1604.69,1343.69 1667.18,1406.18 1774.69,1406.18 1897.69,1529.18 1941.69,1529.18 1946.69,1364.13 1948.3,1362.53 ; v1(2342,1498) 2342,1499.87 2268.69,1573.18 2005.69,1573.18 1993.69,1561.18 1993.69,1407.93 1948.3,1362.53
PC5: "LED - I2C1 -ADC2 IN14,15 PH.8" MCU.34 | length 2087.9
  Top Layer w12: MCU.34 1590.26,1335.26 1686,1431 1726.22,1431 v1(1776,1381.22)
  Bottom Layer w12: 164,1086 184.82,1065.18 303.69,1065.18 318.69,1080.18 665.37,1080.18 715.87,1130.68 1556.65,1130.68 1563.15,1137.18 1600.1,1137.18 1776,1313.08 v1(1776,1381.22)
PC12: "UART PH.1" J.36 MCU.80 | length 5884.6
  Top Layer w12: 64,1319 22.69,1360.31 22.69,2202.18 705.69,2885.18 1594.69,2885.18 1826.48,2653.39 1826.48,1925.97 ; MCU.80 1826.48,1925.97 ; v1(2369,1154) 2285.69,1237.31 2285.69,1672.18 2021.69,1936.18 1836.69,1936.18 1826.48,1925.97
  Bottom Layer w12: v1(2369,1154) 2370,1155 3281,1155 J.36
PD2: "UART PH.2" J.38 MCU.83 | length 4987.8
  Top Layer w12: v1(1528.69,1695.18) 1547.18,1695.18 1685.18,1833.18 1746.69,1833.18 1767.42,1853.91 ; MCU.83 1767.42,1853.91 ; v1(1767.69,1807.18) 1767.42,1807.45 1767.42,1853.91 ; v1(3241.69,2221.18) 3241.69,1096.31 J.38
  Bottom Layer w12: 64,1419 22.69,1460.31 22.69,1545.18 46.69,1569.18 557.69,1569.18 756.69,1768.18 1455.69,1768.18 v1(1528.69,1695.18) ; v1(1767.69,1807.18) 1890.69,1930.18 2408.69,1930.18 2699.69,2221.18 v1(3241.69,2221.18)
PD8: "RS 485 UART 3 ( ADCS ).3" "UART PH.5" MCU.55 | length 4739.8
  Top Layer w12: 164,1319 242.52,1240.48 242.52,275.73 261,257.25 v1(261,254) ; 1433,-12 1433,45 v1@1448.68,60.68 ; v1(1449.18,60.18) 1448,60.18 1408.69,99.49 1408.69,246.18 1473.69,311.18 1791.69,311.18 1921,440.49 1921,490.87 1809.17,602.71 1809.17,762.66 1826.69,780.18 1886.69,780.18 1957.69,851.18 1957.69,1080.18 2123.69,1246.18 2123.69,1401.18 2094.35,1430.52 MCU.55
  Bottom Layer w12: v1(261,254) 261,50.87 294.69,17.18 1406.18,17.18 v1(1449.18,60.18)
PD9: "RS 485 UART 3 ( ADCS ).2" "UART PH.6" MCU.56 | length 5266.2
  Top Layer w12: 164,1419 122.69,1460.31 122.69,1536.18 ; v1(353.69,1050.18) 320.69,1083.18 320.69,1407.18 183.69,1560.18 146.69,1560.18 122.69,1536.18 ; 1383,-12 1383,41.18 983,441.18 771.69,441.18 751.69,461.18 751.69,1018.18 706.69,1063.18 552.69,1063.18 494.69,1121.18 494.69,1330.32 386.83,1438.18 386.83,1601.18 327.83,1660.18 146.69,1660.18 122.69,1636.18 122.69,1536.18 ; v1(1855,1421) 1884.21,1450.21 MCU.56
  Bottom Layer w12: v1(353.69,1050.18) 731.69,1050.18 793.19,1111.68 1632.89,1111.68 1868.69,1347.49 1868.69,1375.77 1855,1389.47 v1(1855,1421)
PD12: "LED - I2C1 -ADC2 IN14,15 PH.1" "P LED.1" LED1.1 MCU.59 | length 4225.6
  Top Layer w12: 1966,1.13 1980.69,1.13 ; MCU.59 2055.61,1509.26 v1(2072.69,1492.18) ; LED1.1 2106.56,910.56 2021.13,910.56 v1(2020.69,911) v1(2020.69,911) 2020.64,86.13 ; 1980.69,1.13 1980.69,46.18 2020.64,86.13 ; 1980.69,1.13 2007.35,1.13 2020.64,14.42 2020.64,86.13
  Bottom Layer w12: 64,786 114.18,836.18 1513.69,836.18 ; v1(2020.69,911) 1811.83,911 1737.02,836.18 1513.69,836.18 ; v1(2072.69,1492.18) 2072.69,1272.18 1982.51,1182 1907.36,1182 1901.36,1188 1880.64,1188 1874.64,1182 1859.51,1182 1513.69,836.18
PD13: "LED - I2C1 -ADC2 IN14,15 PH.2" MCU.60 R7.2 | length 3556.3
  Top Layer w12: R7.2 650.69,-81.72 650.69,220.18 698.69,268.18 v1(698.69,1015.18) ; v1(1881.93,1478.07) 1884.23,1480.36 1884.23,1488.55 1924.62,1528.95 MCU.60
  Bottom Layer w12: 64,886 22.69,927.31 22.69,1006.18 43.69,1027.18 318.69,1027.18 330.69,1015.18 v1(698.69,1015.18) 1290.69,1015.18 1368.19,1092.68 1643.77,1092.68 1908.69,1357.61 1908.69,1451.31 v1(1881.93,1478.07)
PD14: "LED - I2C1 -ADC2 IN14,15 PH.3" MCU.61 R8.2 | length 3903.4
  Top Layer w12: 64,986 104.69,945.31 104.69,120.58 320.09,-94.82 366.69,-94.82 407.98,-53.53 R8.2 ; MCU.61 2105.55,1548.63 v1(2106,1548.18)
  Bottom Layer w12: 64,986 117.82,932.18 469.69,932.18 540.69,861.18 1511.69,861.18 1805.91,1155.4 1805.91,1180.05 2012.69,1386.83 2012.69,1467.54 2069.37,1524.21 2082.03,1524.21 v1(2106,1548.18)
PD15: "LED - I2C1 -ADC2 IN14,15 PH.4" MCU.62 R9.2 | length 3956.9
  Top Layer w12: 64,1086 22.69,1044.69 22.69,121.18 260.69,-116.82 406.69,-116.82 442.69,-80.82 442.69,22.47 429.98,35.18 R9.2 ; v1(1809.69,1529.18) 1848.83,1568.32 MCU.62
  Bottom Layer w12: 64,1086 146.68,1168.68 1512.19,1168.68 1525.89,1182.38 1525.89,1345.38 1709.69,1529.18 v1(1809.69,1529.18)
"RD + (OBC-ADCS)": "RS 485 UART 3 ( ADCS ).8" J.21 R30.1 | length 4966
  Top Layer w12: v1(1228,253) 1299,182 1333,182 ; v1(2240.58,127.58) 2316.6,127.58 2347.17,97.02 2347.17,-25.02 2339.55,-32.63 2243.63,-32.63 2214.63,-3.63 2150.65,-3.63 R30.1 2135,-21.13 2159.32,-45.45 3335.06,-45.45 3475.69,95.18 3475.69,201.18 3341.69,335.18 3341.69,1815.69 J.21
  Bottom Layer w12: v1(1228,253) 2143.87,253 2239.29,157.58 2239.29,128.88 v1(2240.58,127.58)
"RD + (OBC-COMM)": "RS 485 UART 4 ( COMM ).8" J.41 R26.1 | length 5517.3
  Top Layer w12: v1(524,400) 525.5,400 575,350.5 575,322 ; v1(1596,-139) 1620,-115 R26.1
  Bottom Layer w12: v1(524,400) 524,361.49 514.6,352.09 316.46,352.09 293.55,329.18 46.69,329.18 22.69,305.18 22.69,161.18 278.87,-95 1552,-95 v1(1596,-139) 1598.3,-136.7 1598.3,-124.98 1602.27,-121 1602.27,-118.4 1575.69,-91.82 1556.82,-91.82 1513,-48 1513,32.36 1527.64,47 1594.66,47 1684.48,-42.82 3126.69,-42.82 3167.69,-1.82 3167.69,160.18 3322.69,315.18 3322.69,796.69 J.41
"RD + (OBC-EPS)": "RS 485 UART 2 ( EPS ).8" J.01 R28.1 | length 4353
  Top Layer w12: 2050,516 2050,598.05 2066.69,614.75 2237.61,614.75 2442.69,409.66 2442.69,55.46 2489.95,8.21 2526.69,8.21 ; R28.1 2526.69,8.21 ; J.01 3321.97,2795.97 3254.48,2795.97 2665.72,2207.21 2665.72,1737.73 2523.69,1595.7 2523.69,889.59 2462.69,828.59 2462.69,72.21 2526.69,8.21
"RD - (OBC-ADCS)": "RS 485 UART 3 ( ADCS ).7" J.19 R30.2 | length 4516
  Top Layer w12: v1(1382.69,106.69) 1382.85,106.85 1382.85,181.85 1383,182 ; v1(2045.69,105.18) 2070.9,79.98 2101.9,79.98 ; R30.2 2101.9,79.98 ; J.19 3451.69,1886.31 3451.69,252.05 3494.69,209.05 3494.69,-3.82 3434.06,-64.45 2131.32,-64.45 2065.69,1.18 2065.69,58.98 2101.9,79.98
  Bottom Layer w12: v1(1382.69,106.69) 1406.99,131 1406.99,150.48 1428.69,172.18 2019.82,172.18 2045.69,146.31 v1(2045.69,105.18)
"RD - (OBC-COMM)": "RS 485 UART 4 ( COMM ).7" J.39 R26.2 | length 4312.5
  Top Layer w12: v1(600,216) 625,241 625,322 ; v1(1538,22) 1538,23.04 1562.93,47.98 1588.1,47.98 ; v1(1540,97.18) 1540,96.08 1588.1,47.98 ; R26.2 1588.1,47.98
  Bottom Layer w12: v1(600,216) 717.82,98.18 908.69,98.18 938.69,68.18 1211.69,68.18 1220.51,77 1429.46,77 1437.64,85.18 1474.64,85.18 1482.82,77 1519.82,77 v1(1540,97.18) ; v1(1538,22) 1538,-46.13 1564.69,-72.82 3354.69,-72.82 3475.69,48.18 3475.69,343.18 3422.69,396.18 3422.69,915.31 J.39
"RD - (OBC-EPS)": "RS 485 UART 2 ( EPS ).7" J.02 R28.2 | length 5128.6
  Top Layer w12: 2100,516 2100,487.5 2104.5,483 2111,483 2174.69,419.31 2174.69,194.18 2205.24,163.63 2315.24,163.63 2397.69,81.18 2397.69,37.18 2446.69,-11.82 2505.06,-11.82 2519.69,-26.45 2601.69,-26.45 2601.69,76.16 ; R28.2 2601.69,76.16 ; J.02 3322.18,2896.18 3426.69,2896.18 3441.69,2881.18 3441.69,2241.18 3396.69,2196.18 3346.69,2196.18 3322.69,2172.18 3322.69,315.18 3241.69,234.18 3241.69,41.18 3187.69,-12.82 3086.69,-12.82 3041.69,32.18 3041.69,111.18 2991.69,161.18 2911.82,161.18 2888.32,137.68 2888.32,19.81 2866.69,-1.82 2716.69,-1.82 2638.72,76.16 2601.69,76.16
"RST Soft-Reset": J.25
"Solar Array Input": J.24
"TD + (OBC-ADCS)": "RS 485 UART 3 ( ADCS ).5" J.17 R29.1 | length 4398.2
  Top Layer w12: 1483,182 1531.72,182 1553.07,160.65 1577.35,160.65 v1(1601,137) ; v1(1693.99,-16.98) R29.1 1779.69,-16.98 1779.69,-58.82 1811.69,-90.82 3458.69,-90.82 3513.69,-35.82 3513.69,227.18 3470.69,270.18 3470.69,1967.31 J.17
  Bottom Layer w12: v1(1601,137) 1597.75,137 1588.67,127.91 1587.91,127.91 1573.48,113.48 1573.48,103.54 v1(1693.99,-16.98)
"TD + (OBC-COMM)": "RS 485 UART 4 ( COMM ).5" J.37 R25.1 | length 4439.9
  Top Layer w12: 725,322 725,293.5 729.5,289 775,289 v1(818,246) ; v1(2215.85,22.02) 2235.85,2.02 R25.1
  Bottom Layer w12: v1(818,246) 856.82,207.18 2106.69,207.18 ; v1(2215.85,22.02) 2215.85,122.02 2130.69,207.18 2106.69,207.18 ; J.37 3332.69,1006.69 3130.69,1006.69 3084.69,960.69 3084.69,315.18 3130.69,269.18 3117.69,-23.82 2086.69,-23.82 2065.69,-2.82 2065.69,90.18 2133,157.49 2133,180.87 2106.69,207.18
"TD + (OBC-EPS)": "RS 485 UART 2 ( EPS ).5" J.03 R27.1 | length 4386.7
  Top Layer w12: 2200,516 2200,436 v1(2258,378) ; R27.1 3127.49,22.02 3070,79.51 3070,110.26 3091.85,132.11 3091.85,162.85 3090.7,164 3015.74,164 2946.17,233.58 2946.17,437.66 3146.69,638.18 v1(3146.69,2601.18)
  Bottom Layer w12: v1(2258,378) 2336,456 2447.87,456 2690.39,213.48 3032.74,213.48 v1(3087.61,158.61) ; v1(3146.69,2601.18) 3146.69,2761.18 3191.69,2806.18 3331.82,2806.18 J.03
"TD - (OBC-ADCS)": "RS 485 UART 3 ( ADCS ).6" J.15 R29.2 | length 4008.1
  Top Layer w12: 1433,182 1433,221.18 1460,248.18 1505.49,248.18 1554.79,198.88 1641.12,198.88 1653.39,186.61 1653.39,100.28 1702.69,50.98 R29.2 1806.69,50.98 1976,220.28 1976,299.83 1995.69,319.52 1995.69,941.37 2002.72,948.4 2099.59,948.4 2235,1083.81 v1(2235,1446)
  Bottom Layer w12: v1(2235,1446) 2654.56,1446 2672.38,1428.18 3088.69,1428.18 3272.69,1612.18 3406.69,1612.18 3422.69,1628.18 3422.69,2115.31 J.15
"TD - (OBC-COMM)": "RS 485 UART 4 ( COMM ).6" J.35 R25.2 | length 3925.3
  Top Layer w12: v1(628,433.18) 649.87,411.32 649.87,404.13 675,379 675,322 ; v1(2100,441) 2098,439 2098,399.87 2123.69,374.18 2123.69,209.12 2262.83,69.98 R25.2
  Bottom Layer w12: v1(628,433.18) 978.32,433.18 1033.32,378.18 1350.69,378.18 1404.69,432.18 1697.69,432.18 1743.31,386.57 1861.08,386.57 2084.69,610.18 2110.69,610.18 ; v1(2100,441) 2100,521.87 2110.69,532.56 2110.69,610.18 ; J.35 3327.18,1101.18 2993.69,1101.18 2502.69,610.18 2110.69,610.18
"TD - (OBC-EPS)": "RS 485 UART 2 ( EPS ).6" J.04 R27.2 | length 4086.6
  Top Layer w12: 2150,516 2150,544.5 2173.5,568 2232,568 v1(2282,518) ; v1(3049.09,232.48) 3113.96,167.61 3113.96,89.98 R27.2 3133,270.65 3174,311.64 3174,332.36 3133,373.35 3133,387.65 3172,426.64 3172,447.36 3165.69,453.66 3165.69,1529.6 3171.69,1535.6 3171.69,2611.54 3159.59,2623.64 3159.59,2633.58 J.04
  Bottom Layer w12: v1(2282,518) 2336.18,572.18 2525.34,572.18 2865.05,232.48 v1(3049.09,232.48)
VBAT: C12.1 MCU.6 R2.2 | length 1082.4
  Top Layer w12: v1(924,1679) 924.87,1679 955.02,1648.85 C12.1 ; v1(1287.98,1743.18) 1287.98,1995.8 1312.48,2020.3 1312.48,2022.97 1334.69,2045.18 1416.69,2045.18 1428,2033.87 R2.2 ; v1@1289.4,1744.6 1289.8,1744.6 1308.61,1725.8 MCU.6
  Bottom Layer w12: v1(924,1679) 988.18,1743.18 v1(1287.98,1743.18)
VBAT+: J.49 J.51 | length 100
  Top Layer w12: J.51 J.49
VCAP_1: C14.2 C35.2 MCU.49 | length 2225.7
  Top Layer w12: MCU.49 1885.53,1321.18 1895.73,1331.38 1920.49,1331.38 1930.69,1321.18 1930.69,1071.83 1926.63,1071.83 1900.98,1046.18 ; C14.2 1900.98,1029.27 1915,1015.25 v1(1915,1012) ; v1(2821.69,1081.18) 2821.69,374.98 2866.69,329.98 C35.2
  Bottom Layer w12: v1(1915,1012) 1967.51,1012 1978.33,1001.18 2027.59,1001.18 2081.14,1054.73 2081.14,1066.35 2095.98,1081.18 v1(2821.69,1081.18)
VCAP_2: C13.2 C36.2 MCU.73 | length 4513.8
  Top Layer w12: C13.2 409.98,259.45 416,253.43 v1(416,250.18) ; v1(1959,318.18) 1959,699.82 1976.69,717.51 1976.69,1072.18 2173.69,1269.18 2173.69,1653.18 2042.02,1784.85 MCU.73 ; v1(2924.66,129.4) 2936.53,76.16 C36.2
  Bottom Layer w12: v1(416,250.18) 416,285.24 432.21,301.45 1939.02,301.45 1955.75,318.18 v1(1959,318.18) ; v1@1959,321 1961.82,318.18 2241.69,318.18 2430.47,129.4 v1(2924.66,129.4)
VDDA: C1.2 C2.2 Inductor.1 MCU.22 R1.2 | length 1526.5
  Top Layer w12: Inductor.1 933.69,535 1344.95,946.26 1344.95,977.16 ; R1.2 1200.98,1234.83 1231.69,1234.83 ; MCU.22 1246.69,1410.84 1231.69,1395.84 1231.69,1234.83 ; C1.2 1434.95,887.17 1344.95,977.16 ; 1231.69,1234.83 1231.69,1209.76 1344.95,1096.5 C2.2 1344.95,977.16
VREF+: C3.1 C4.1 MCU.21 R1.1 | length 1647.8
  Top Layer w12: C4.1 720.02,1163.51 766.52,1210.01 ; C3.1 949.02,1299 949.02,1256.51 813.02,1256.51 766.52,1210.01 ; 1106.69,1202.35 1133.02,1228.68 R1.1 ; v1(1182,1193.68) 914.83,1193.68 898.5,1210.01 766.52,1210.01 ; MCU.21 1473.38,1430.52 v1(1512.6,1469.74)
  Bottom Layer w12: v1(1182,1193.68) 1318.05,1193.68 1324.05,1187.68 1499.86,1187.68 1506.89,1194.71 1506.89,1353.25 1511,1357.36 1511,1393.74 1486.84,1417.9 1486.84,1443.98 v1(1512.6,1469.74)
pads on no net: J.13 J.23 J.26 J.27 J.33 J.34 J.40 J.43 J.44 J.47 J.48 MCU.1 MCU.2 MCU.3 MCU.4 MCU.5 MCU.7 MCU.15 MCU.16 MCU.37 MCU.38 MCU.39 MCU.40 MCU.41 MCU.42 MCU.43 MCU.44 MCU.45 MCU.46 MCU.48 MCU.52 MCU.53 MCU.54 MCU.57 MCU.58 MCU.63 MCU.64 MCU.65 MCU.66 MCU.67 MCU.68 MCU.69 MCU.70 MCU.71 MCU.77 MCU.78 MCU.79 MCU.81 MCU.82 MCU.84 MCU.85 MCU.86 MCU.87 MCU.88 MCU.89 MCU.90 MCU.91 MCU.95 MCU.96 MCU.97 MCU.98
copper on no net: | length 15.6
  Bottom Layer w12: 1811,1093 1822,1104

## Polygon pours and split planes (outlines as drawn)
G on Ground (split plane): 175 vertices, not listed, extent -173.26,-178.78 3544.52,3336.26
"3.3v (OBC)" on Power (split plane): 175 vertices, not listed, extent -173.26,-178.78 3544.52,3336.26

## Silkscreen, mask and mechanical layers (free items; w line width, h text height)
Top Overlay:
  text "OBC BOARD" at 164,2547 h60
  text "AL AZHAR UNIVERSITY" at -116,2420 h60
  text "+" at 2079,865.33 h10
  text "+" at 1563,577.33 h10
  text "+" at 900,-9.67 h10
  text "+" at 1957,-56.67 h10
  text "+" at 1139,-67.67 h10
Mechanical 1:
  lines w10: -193.31,-120.08 ccw(c-153.94,-120.08) -153.94,-159.45 114.17,-159.45 cw(c114.17,-223.13) 159.2,-178.1 161.27,-180.17 ccw(c206.3,-135.14) 206.3,-198.82 2272.83,-198.82 ccw(c2272.83,-150.82) 2306.78,-184.76 2368.42,-123.11 cw(c2402.36,-157.05) 2402.36,-109.06 3525.2,-109.05 ccw(c3525.2,-69.68) 3564.57,-69.68 3564.57,285.43 ccw(c3513.72,285.43) 3549.67,321.39 3528.54,342.52 3502.04,369.03 cw(c3532.62,399.61) 3489.37,399.61 3489.37,2671.26 cw(c3582.52,2671.26) 3516.65,2737.12 3535.32,2755.79 ccw(c3469.45,2821.65) 3562.6,2821.65 3562.6,3131.5 ccw(c3523.23,3131.5) 3523.23,3170.87 3218.5,3170.87 cw(c3218.5,3276.37) 3143.9,3201.77 3020.27,3325.4 ccw(c2945.67,3250.8) 2945.67,3356.3 292.91,3356.3 287.48,3356.3 ccw(c287.48,3289.09) 239.96,3336.61 cw(c192.44,3384.14) 192.44,3316.93 187.01,3316.93 -153.94,3316.93 ccw(c-153.94,3277.56) -193.31,3277.56 -193.31,-120.08

## Text inside footprints (layer, text, board x,y; h text height)
MAX471: Top Overlay "GND" at 2748,1340 h20.63; Top Overlay "GND" at 2653,1335 h20.63; Top Overlay "AT" at 2563,1330 h20.63; Top Overlay "VT" at 2463,1335 h20.63; Top Overlay "GND" at 2948,1885 h20.63; Top Overlay "Vout" at 2743,1880 h20.63; Top Overlay "GND" at 2443,1875 h20.63; Top Overlay "Vin" at 2248,1880 h20.63